# EAGLE board Qwiic_Hall_Effect_Sensor_TMAG5273_Mini-Panel (EAGLE 9.6.2), part 1 of 4
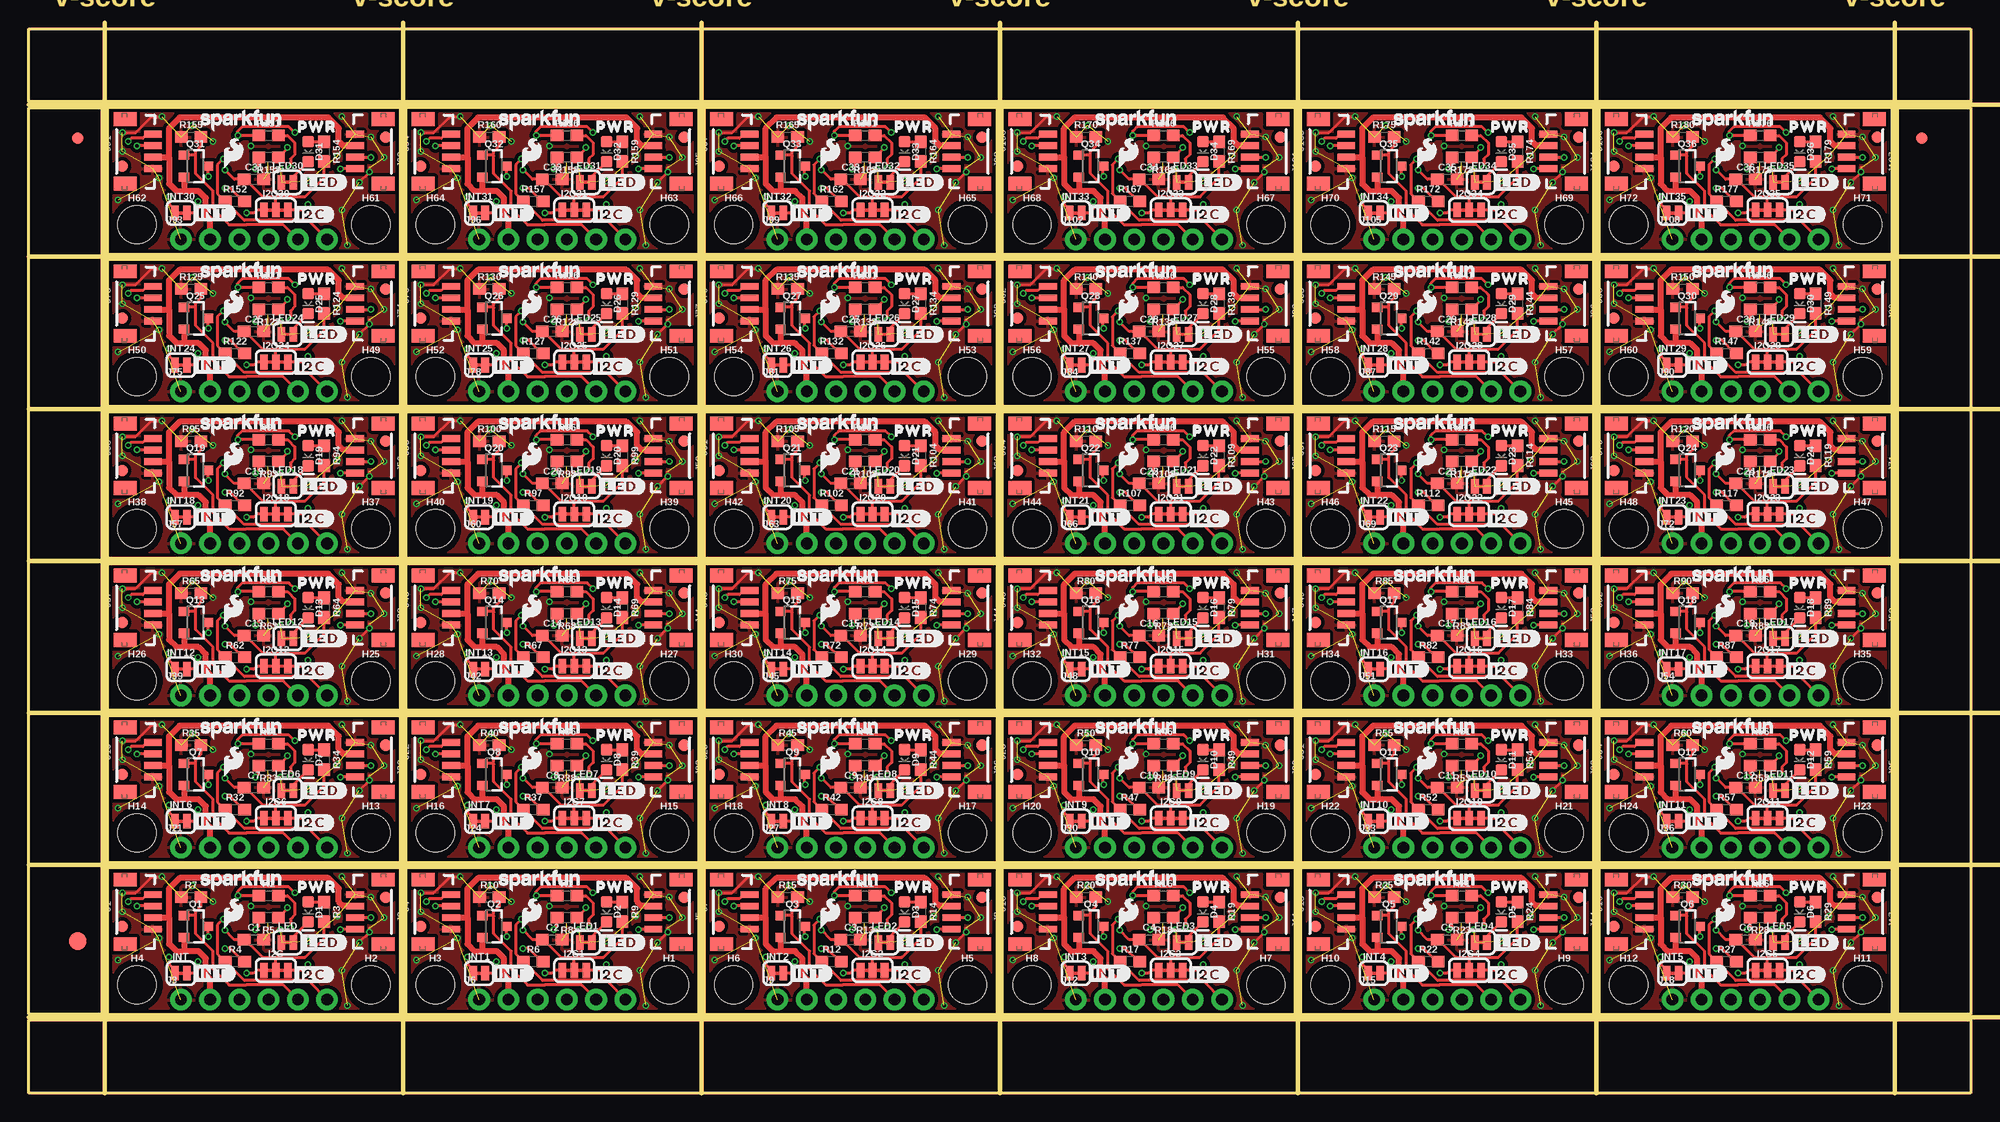
[diagram p0: board, top side]
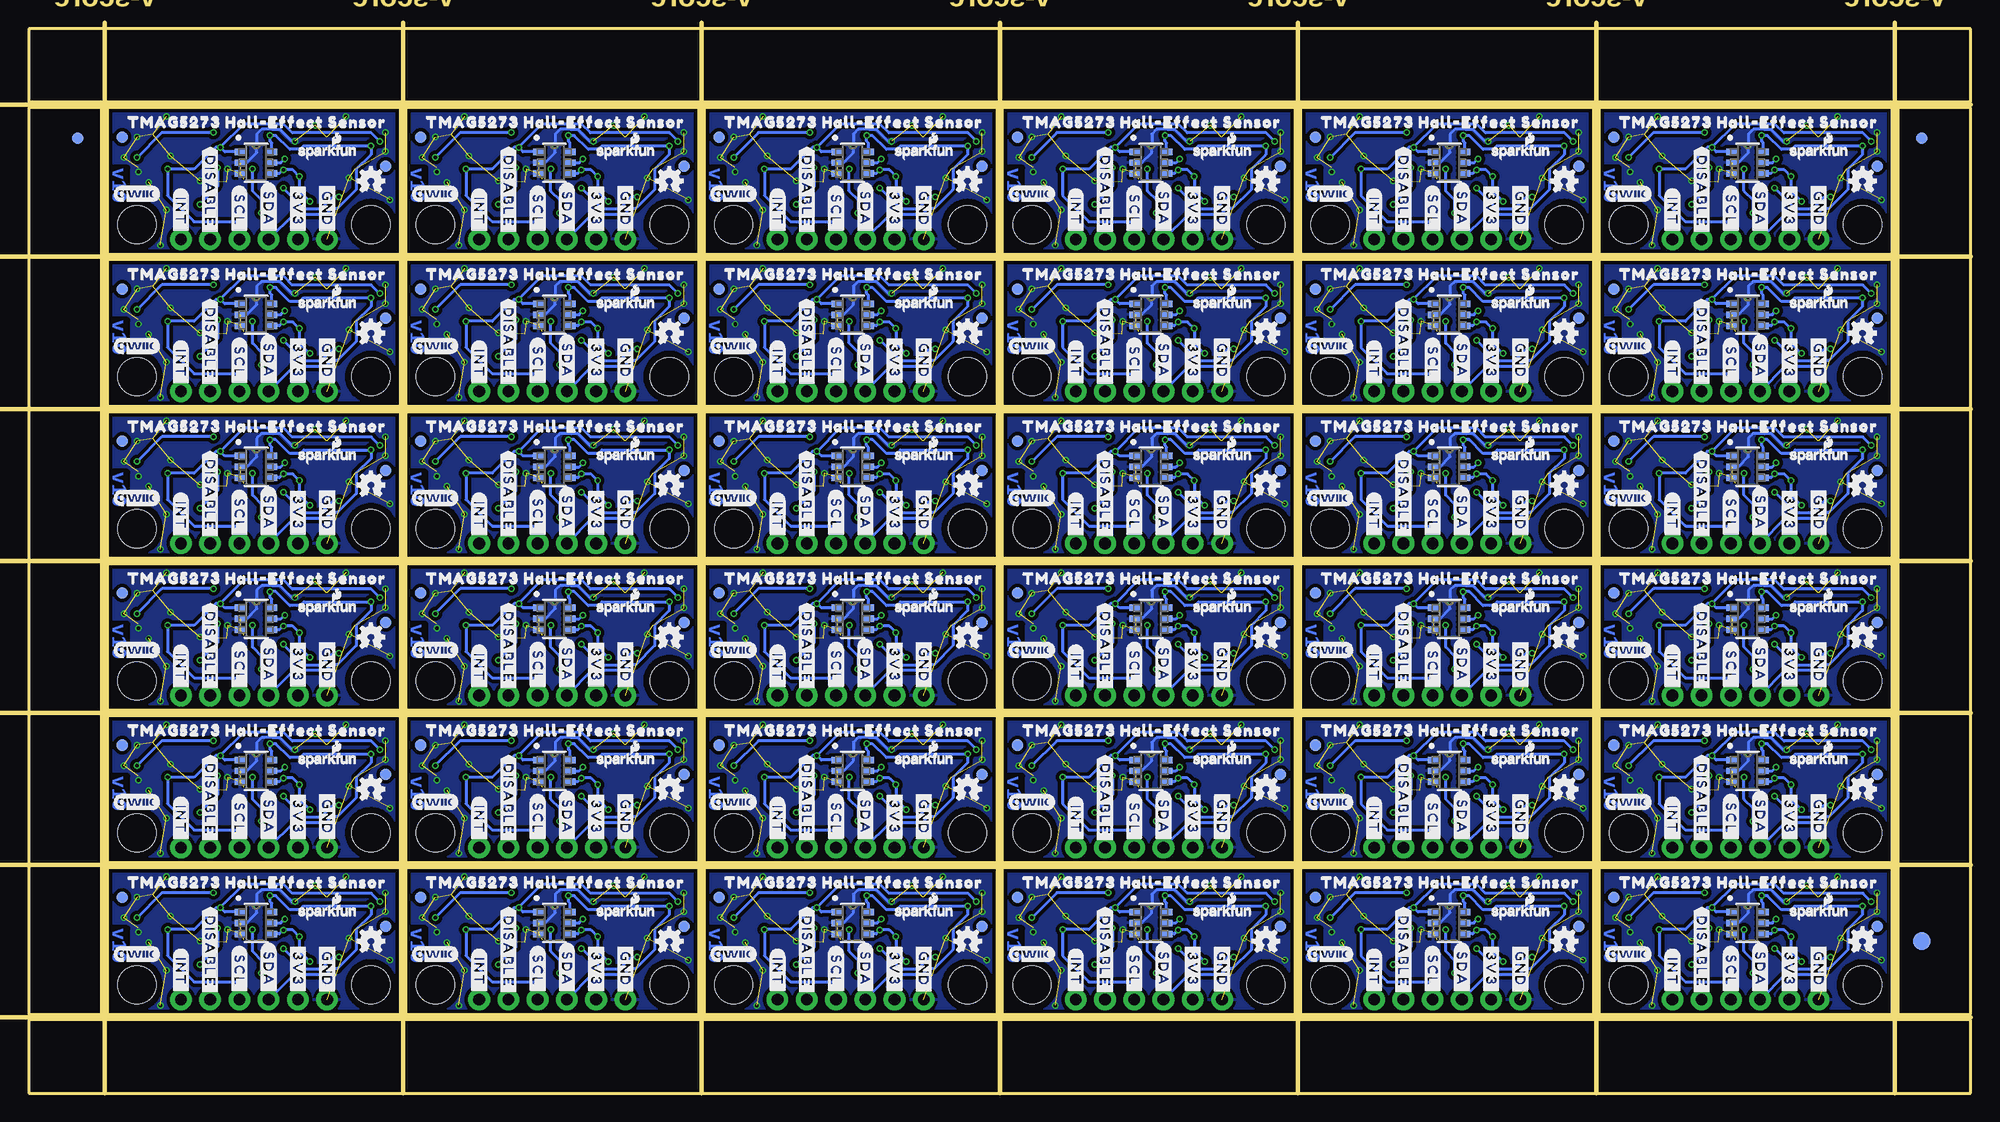
[diagram p1: board, bottom side, seen from below]

Size 168.66 x 92.46 mm. Coordinates in mm from the lower left corner, seen from the top.
Outline: 6.86,6.86 32.26,6.86 32.26,19.56 6.86,19.56 6.86,6.86
Outline: 32.77,6.86 58.17,6.86 58.17,19.56 32.77,19.56 32.77,6.86
Outline: 58.67,6.86 84.07,6.86 84.07,19.56 58.67,19.56 58.67,6.86
Outline: 84.58,6.86 109.98,6.86 109.98,19.56 84.58,19.56 84.58,6.86
Outline: 110.49,6.86 135.89,6.86 135.89,19.56 110.49,19.56 110.49,6.86
Outline: 136.4,6.86 161.8,6.86 161.8,19.56 136.4,19.56 136.4,6.86
Outline: 6.86,20.07 32.26,20.07 32.26,32.77 6.86,32.77 6.86,20.07
Outline: 32.77,20.07 58.17,20.07 58.17,32.77 32.77,32.77 32.77,20.07
Outline: 58.67,20.07 84.07,20.07 84.07,32.77 58.67,32.77 58.67,20.07
Outline: 84.58,20.07 109.98,20.07 109.98,32.77 84.58,32.77 84.58,20.07
Outline: 110.49,20.07 135.89,20.07 135.89,32.77 110.49,32.77 110.49,20.07
Outline: 136.4,20.07 161.8,20.07 161.8,32.77 136.4,32.77 136.4,20.07
Outline: 6.86,33.27 32.26,33.27 32.26,45.97 6.86,45.97 6.86,33.27
Outline: 32.77,33.27 58.17,33.27 58.17,45.97 32.77,45.97 32.77,33.27
Outline: 58.67,33.27 84.07,33.27 84.07,45.97 58.67,45.97 58.67,33.27
Outline: 84.58,33.27 109.98,33.27 109.98,45.97 84.58,45.97 84.58,33.27
Outline: 110.49,33.27 135.89,33.27 135.89,45.97 110.49,45.97 110.49,33.27
Outline: 136.4,33.27 161.8,33.27 161.8,45.97 136.4,45.97 136.4,33.27
Outline: 6.86,46.48 32.26,46.48 32.26,59.18 6.86,59.18 6.86,46.48
Outline: 32.77,46.48 58.17,46.48 58.17,59.18 32.77,59.18 32.77,46.48
Outline: 58.67,46.48 84.07,46.48 84.07,59.18 58.67,59.18 58.67,46.48
Outline: 84.58,46.48 109.98,46.48 109.98,59.18 84.58,59.18 84.58,46.48
Outline: 110.49,46.48 135.89,46.48 135.89,59.18 110.49,59.18 110.49,46.48
Outline: 136.4,46.48 161.8,46.48 161.8,59.18 136.4,59.18 136.4,46.48
Outline: 6.86,59.69 32.26,59.69 32.26,72.39 6.86,72.39 6.86,59.69
Outline: 32.77,59.69 58.17,59.69 58.17,72.39 32.77,72.39 32.77,59.69
Outline: 58.67,59.69 84.07,59.69 84.07,72.39 58.67,72.39 58.67,59.69
Outline: 84.58,59.69 109.98,59.69 109.98,72.39 84.58,72.39 84.58,59.69
Outline: 110.49,59.69 135.89,59.69 135.89,72.39 110.49,72.39 110.49,59.69
Outline: 136.4,59.69 161.8,59.69 161.8,72.39 136.4,72.39 136.4,59.69
Outline: 6.86,72.9 32.26,72.9 32.26,85.6 6.86,85.6 6.86,72.9
Outline: 32.77,72.9 58.17,72.9 58.17,85.6 32.77,85.6 32.77,72.9
Outline: 58.67,72.9 84.07,72.9 84.07,85.6 58.67,85.6 58.67,72.9
Outline: 84.58,72.9 109.98,72.9 109.98,85.6 84.58,85.6 84.58,72.9
Outline: 110.49,72.9 135.89,72.9 135.89,85.6 110.49,85.6 110.49,72.9
Outline: 136.4,72.9 161.8,72.9 161.8,85.6 136.4,85.6 136.4,72.9
Outline: 0,6.35 168.66,6.35 168.66,0 0,0 0,6.35
Outline: 162.31,85.6 168.66,85.6 168.66,6.86 162.31,6.86 162.31,85.6
Outline: 0,92.46 168.66,92.46 168.66,86.11 0,86.11 0,92.46
Outline: 0,85.6 6.35,85.6 6.35,6.86 0,6.86 0,85.6
Copper layers (1*16): Top 0.035mm / dielectric 1.5mm / Bottom 0.035mm
Design rules "Qwiic_Hall_Effect_Sensor_TMAG5273_Mini": minimum track width 5mil, minimum drill 0.3mm, track to track 5mil, track to pad 5mil, pad to pad 5mil, via to via 5mil, smd to smd 5mil, copper to edge 7mil, drill to drill 7mil, minimum pad ring 5mil, minimum via ring 5mil, stop-mask expansion 2.5mil, vias tented up to drill 25mil, thermal gap 10mil
Milling: 14 lines

## Footprints (pad centres in the part's own frame; a part is rotated, then mirrored left to right if it is on the bottom)
0603 = smd 1.1 x 1: 1 -0.85,0; 2 0.85,0
LED-0603 = smd 1 x 1: A -0.877,0; C 0.877,0
FIDUCIAL-1X2 = smd 1 x 1: 1 0,0
FIDUCIAL-1.5X3 = smd 1.5 x 1.5: 1 0,0
STAND-OFF = hole 3.302: 0,0
SMT-JUMPER_3_2-NC_TRACE_SILK = smd 0.66 x 1.27: 1 -1.041,0; 2 0,0; 3 1.041,0
SMT-JUMPER_2_NC_TRACE_SILK = smd 0.66 x 1.27: 1 -0.521,0; 2 0.521,0
JST04_1MM_VERT = smd 0.6 x 1.55: 1 -1.5,0.775; 2 -0.5,0.775; 3 0.5,0.775; 4 1.5,0.775 | smd 1.2 x 2: NC1 -2.8,3.2; NC2 2.8,3.2
1X06_NO_SILK = drill 1.016 pad 1.88: 1 0,0; 2 2.54,0; 3 5.08,0; 4 7.62,0; 5 10.16,0; 6 12.7,0
SOT23-3 = smd 0.8 x 0.9: 1 -0.95,-1; 2 0.95,-1; 3 0,1.1
SOT23-6_DBV_TEX = smd 0.978 x 0.559: 1 -1.365,0.95; 2 -1.365,0; 3 -1.365,-0.95; 4 1.365,-0.95; 5 1.365,0; 6 1.365,0.95

## Placement (x,y rotation side)
C1  0.1uF  [0603]  19.56,13.34 0 top
C2  0.1uF  [0603]  45.47,13.34 0 top
C3  0.1uF  [0603]  71.37,13.34 0 top
C4  0.1uF  [0603]  97.28,13.34 0 top
C5  0.1uF  [0603]  123.19,13.34 0 top
C6  0.1uF  [0603]  149.1,13.34 0 top
C7  0.1uF  [0603]  19.56,26.54 0 top
C8  0.1uF  [0603]  45.47,26.54 0 top
C9  0.1uF  [0603]  71.37,26.54 0 top
C10  0.1uF  [0603]  97.28,26.54 0 top
C11  0.1uF  [0603]  123.19,26.54 0 top
C12  0.1uF  [0603]  149.1,26.54 0 top
C13  0.1uF  [0603]  19.56,39.75 0 top
C14  0.1uF  [0603]  45.47,39.75 0 top
C15  0.1uF  [0603]  71.37,39.75 0 top
C16  0.1uF  [0603]  97.28,39.75 0 top
C17  0.1uF  [0603]  123.19,39.75 0 top
C18  0.1uF  [0603]  149.1,39.75 0 top
C19  0.1uF  [0603]  19.56,52.96 0 top
C20  0.1uF  [0603]  45.47,52.96 0 top
C21  0.1uF  [0603]  71.37,52.96 0 top
C22  0.1uF  [0603]  97.28,52.96 0 top
C23  0.1uF  [0603]  123.19,52.96 0 top
C24  0.1uF  [0603]  149.1,52.96 0 top
C25  0.1uF  [0603]  19.56,66.17 0 top
C26  0.1uF  [0603]  45.47,66.17 0 top
C27  0.1uF  [0603]  71.37,66.17 0 top
C28  0.1uF  [0603]  97.28,66.17 0 top
C29  0.1uF  [0603]  123.19,66.17 0 top
C30  0.1uF  [0603]  149.1,66.17 0 top
C31  0.1uF  [0603]  19.56,79.38 0 top
C32  0.1uF  [0603]  45.47,79.38 0 top
C33  0.1uF  [0603]  71.37,79.38 0 top
C34  0.1uF  [0603]  97.28,79.38 0 top
C35  0.1uF  [0603]  123.19,79.38 0 top
C36  0.1uF  [0603]  149.1,79.38 0 top
D1  Red  [LED-0603]  24.26,15.75 270 top
D2  Red  [LED-0603]  50.16,15.75 270 top
D3  Red  [LED-0603]  76.07,15.75 270 top
D4  Red  [LED-0603]  101.98,15.75 270 top
D5  Red  [LED-0603]  127.89,15.75 270 top
D6  Red  [LED-0603]  153.8,15.75 270 top
D7  Red  [LED-0603]  24.26,28.96 270 top
D8  Red  [LED-0603]  50.16,28.96 270 top
D9  Red  [LED-0603]  76.07,28.96 270 top
D10  Red  [LED-0603]  101.98,28.96 270 top
D11  Red  [LED-0603]  127.89,28.96 270 top
D12  Red  [LED-0603]  153.8,28.96 270 top
D13  Red  [LED-0603]  24.26,42.16 270 top
D14  Red  [LED-0603]  50.16,42.16 270 top
D15  Red  [LED-0603]  76.07,42.16 270 top
D16  Red  [LED-0603]  101.98,42.16 270 top
D17  Red  [LED-0603]  127.89,42.16 270 top
D18  Red  [LED-0603]  153.8,42.16 270 top
D19  Red  [LED-0603]  24.26,55.37 270 top
D20  Red  [LED-0603]  50.16,55.37 270 top
D21  Red  [LED-0603]  76.07,55.37 270 top
D22  Red  [LED-0603]  101.98,55.37 270 top
D23  Red  [LED-0603]  127.89,55.37 270 top
D24  Red  [LED-0603]  153.8,55.37 270 top
D25  Red  [LED-0603]  24.26,68.58 270 top
D26  Red  [LED-0603]  50.16,68.58 270 top
D27  Red  [LED-0603]  76.07,68.58 270 top
D28  Red  [LED-0603]  101.98,68.58 270 top
D29  Red  [LED-0603]  127.89,68.58 270 top
D30  Red  [LED-0603]  153.8,68.58 270 top
D31  Red  [LED-0603]  24.26,81.79 270 top
D32  Red  [LED-0603]  50.16,81.79 270 top
D33  Red  [LED-0603]  76.07,81.79 270 top
D34  Red  [LED-0603]  101.98,81.79 270 top
D35  Red  [LED-0603]  127.89,81.79 270 top
D36  Red  [LED-0603]  153.8,81.79 270 top
E$1  [FIDUCIAL-1X2]  4.23,82.93 0 top
E$2  [FIDUCIAL-1X2]  4.23,82.93 0 bottom
E$3  [FIDUCIAL-1X2]  164.42,82.93 0 top
E$4  [FIDUCIAL-1X2]  164.42,82.93 0 bottom
E$5  [FIDUCIAL-1.5X3]  4.23,13.21 0 top
E$6  [FIDUCIAL-1.5X3]  4.23,13.21 0 bottom
FD1  FIDUCIAL1X2  [FIDUCIAL-1X2]  30.99,17.02 0 top
FD2  FIDUCIAL1X2  [FIDUCIAL-1X2]  8.13,14.48 0 top
FD3  FIDUCIAL1X2  [FIDUCIAL-1X2]  8.13,14.48 0 bottom
FD4  FIDUCIAL1X2  [FIDUCIAL-1X2]  30.99,17.02 0 bottom
FD5  FIDUCIAL1X2  [FIDUCIAL-1X2]  56.9,17.02 0 top
FD6  FIDUCIAL1X2  [FIDUCIAL-1X2]  34.04,14.48 0 top
FD7  FIDUCIAL1X2  [FIDUCIAL-1X2]  34.04,14.48 0 bottom
FD8  FIDUCIAL1X2  [FIDUCIAL-1X2]  56.9,17.02 0 bottom
FD9  FIDUCIAL1X2  [FIDUCIAL-1X2]  82.8,17.02 0 top
FD10  FIDUCIAL1X2  [FIDUCIAL-1X2]  59.94,14.48 0 top
FD11  FIDUCIAL1X2  [FIDUCIAL-1X2]  59.94,14.48 0 bottom
FD12  FIDUCIAL1X2  [FIDUCIAL-1X2]  82.8,17.02 0 bottom
FD13  FIDUCIAL1X2  [FIDUCIAL-1X2]  108.71,17.02 0 top
FD14  FIDUCIAL1X2  [FIDUCIAL-1X2]  85.85,14.48 0 top
FD15  FIDUCIAL1X2  [FIDUCIAL-1X2]  85.85,14.48 0 bottom
FD16  FIDUCIAL1X2  [FIDUCIAL-1X2]  108.71,17.02 0 bottom
FD17  FIDUCIAL1X2  [FIDUCIAL-1X2]  134.62,17.02 0 top
FD18  FIDUCIAL1X2  [FIDUCIAL-1X2]  111.76,14.48 0 top
FD19  FIDUCIAL1X2  [FIDUCIAL-1X2]  111.76,14.48 0 bottom
FD20  FIDUCIAL1X2  [FIDUCIAL-1X2]  134.62,17.02 0 bottom
FD21  FIDUCIAL1X2  [FIDUCIAL-1X2]  160.53,17.02 0 top
FD22  FIDUCIAL1X2  [FIDUCIAL-1X2]  137.67,14.48 0 top
FD23  FIDUCIAL1X2  [FIDUCIAL-1X2]  137.67,14.48 0 bottom
FD24  FIDUCIAL1X2  [FIDUCIAL-1X2]  160.53,17.02 0 bottom
FD25  FIDUCIAL1X2  [FIDUCIAL-1X2]  30.99,30.23 0 top
FD26  FIDUCIAL1X2  [FIDUCIAL-1X2]  8.13,27.69 0 top
FD27  FIDUCIAL1X2  [FIDUCIAL-1X2]  8.13,27.69 0 bottom
FD28  FIDUCIAL1X2  [FIDUCIAL-1X2]  30.99,30.23 0 bottom
FD29  FIDUCIAL1X2  [FIDUCIAL-1X2]  56.9,30.23 0 top
FD30  FIDUCIAL1X2  [FIDUCIAL-1X2]  34.04,27.69 0 top
FD31  FIDUCIAL1X2  [FIDUCIAL-1X2]  34.04,27.69 0 bottom
FD32  FIDUCIAL1X2  [FIDUCIAL-1X2]  56.9,30.23 0 bottom
FD33  FIDUCIAL1X2  [FIDUCIAL-1X2]  82.8,30.23 0 top
FD34  FIDUCIAL1X2  [FIDUCIAL-1X2]  59.94,27.69 0 top
FD35  FIDUCIAL1X2  [FIDUCIAL-1X2]  59.94,27.69 0 bottom
FD36  FIDUCIAL1X2  [FIDUCIAL-1X2]  82.8,30.23 0 bottom
FD37  FIDUCIAL1X2  [FIDUCIAL-1X2]  108.71,30.23 0 top
FD38  FIDUCIAL1X2  [FIDUCIAL-1X2]  85.85,27.69 0 top
FD39  FIDUCIAL1X2  [FIDUCIAL-1X2]  85.85,27.69 0 bottom
FD40  FIDUCIAL1X2  [FIDUCIAL-1X2]  108.71,30.23 0 bottom
FD41  FIDUCIAL1X2  [FIDUCIAL-1X2]  134.62,30.23 0 top
FD42  FIDUCIAL1X2  [FIDUCIAL-1X2]  111.76,27.69 0 top
FD43  FIDUCIAL1X2  [FIDUCIAL-1X2]  111.76,27.69 0 bottom
FD44  FIDUCIAL1X2  [FIDUCIAL-1X2]  134.62,30.23 0 bottom
FD45  FIDUCIAL1X2  [FIDUCIAL-1X2]  160.53,30.23 0 top
FD46  FIDUCIAL1X2  [FIDUCIAL-1X2]  137.67,27.69 0 top
FD47  FIDUCIAL1X2  [FIDUCIAL-1X2]  137.67,27.69 0 bottom
FD48  FIDUCIAL1X2  [FIDUCIAL-1X2]  160.53,30.23 0 bottom
FD49  FIDUCIAL1X2  [FIDUCIAL-1X2]  30.99,43.43 0 top
FD50  FIDUCIAL1X2  [FIDUCIAL-1X2]  8.13,40.89 0 top
FD51  FIDUCIAL1X2  [FIDUCIAL-1X2]  8.13,40.89 0 bottom
FD52  FIDUCIAL1X2  [FIDUCIAL-1X2]  30.99,43.43 0 bottom
FD53  FIDUCIAL1X2  [FIDUCIAL-1X2]  56.9,43.43 0 top
FD54  FIDUCIAL1X2  [FIDUCIAL-1X2]  34.04,40.89 0 top
FD55  FIDUCIAL1X2  [FIDUCIAL-1X2]  34.04,40.89 0 bottom
FD56  FIDUCIAL1X2  [FIDUCIAL-1X2]  56.9,43.43 0 bottom
FD57  FIDUCIAL1X2  [FIDUCIAL-1X2]  82.8,43.43 0 top
FD58  FIDUCIAL1X2  [FIDUCIAL-1X2]  59.94,40.89 0 top
FD59  FIDUCIAL1X2  [FIDUCIAL-1X2]  59.94,40.89 0 bottom
FD60  FIDUCIAL1X2  [FIDUCIAL-1X2]  82.8,43.43 0 bottom
FD61  FIDUCIAL1X2  [FIDUCIAL-1X2]  108.71,43.43 0 top
FD62  FIDUCIAL1X2  [FIDUCIAL-1X2]  85.85,40.89 0 top
FD63  FIDUCIAL1X2  [FIDUCIAL-1X2]  85.85,40.89 0 bottom
FD64  FIDUCIAL1X2  [FIDUCIAL-1X2]  108.71,43.43 0 bottom
FD65  FIDUCIAL1X2  [FIDUCIAL-1X2]  134.62,43.43 0 top
FD66  FIDUCIAL1X2  [FIDUCIAL-1X2]  111.76,40.89 0 top
FD67  FIDUCIAL1X2  [FIDUCIAL-1X2]  111.76,40.89 0 bottom
FD68  FIDUCIAL1X2  [FIDUCIAL-1X2]  134.62,43.43 0 bottom
FD69  FIDUCIAL1X2  [FIDUCIAL-1X2]  160.53,43.43 0 top
FD70  FIDUCIAL1X2  [FIDUCIAL-1X2]  137.67,40.89 0 top
FD71  FIDUCIAL1X2  [FIDUCIAL-1X2]  137.67,40.89 0 bottom
FD72  FIDUCIAL1X2  [FIDUCIAL-1X2]  160.53,43.43 0 bottom
FD73  FIDUCIAL1X2  [FIDUCIAL-1X2]  30.99,56.64 0 top
FD74  FIDUCIAL1X2  [FIDUCIAL-1X2]  8.13,54.1 0 top
FD75  FIDUCIAL1X2  [FIDUCIAL-1X2]  8.13,54.1 0 bottom
FD76  FIDUCIAL1X2  [FIDUCIAL-1X2]  30.99,56.64 0 bottom
FD77  FIDUCIAL1X2  [FIDUCIAL-1X2]  56.9,56.64 0 top
FD78  FIDUCIAL1X2  [FIDUCIAL-1X2]  34.04,54.1 0 top
FD79  FIDUCIAL1X2  [FIDUCIAL-1X2]  34.04,54.1 0 bottom
FD80  FIDUCIAL1X2  [FIDUCIAL-1X2]  56.9,56.64 0 bottom
FD81  FIDUCIAL1X2  [FIDUCIAL-1X2]  82.8,56.64 0 top
FD82  FIDUCIAL1X2  [FIDUCIAL-1X2]  59.94,54.1 0 top
FD83  FIDUCIAL1X2  [FIDUCIAL-1X2]  59.94,54.1 0 bottom
FD84  FIDUCIAL1X2  [FIDUCIAL-1X2]  82.8,56.64 0 bottom
FD85  FIDUCIAL1X2  [FIDUCIAL-1X2]  108.71,56.64 0 top
FD86  FIDUCIAL1X2  [FIDUCIAL-1X2]  85.85,54.1 0 top
FD87  FIDUCIAL1X2  [FIDUCIAL-1X2]  85.85,54.1 0 bottom
FD88  FIDUCIAL1X2  [FIDUCIAL-1X2]  108.71,56.64 0 bottom
FD89  FIDUCIAL1X2  [FIDUCIAL-1X2]  134.62,56.64 0 top
FD90  FIDUCIAL1X2  [FIDUCIAL-1X2]  111.76,54.1 0 top
FD91  FIDUCIAL1X2  [FIDUCIAL-1X2]  111.76,54.1 0 bottom
FD92  FIDUCIAL1X2  [FIDUCIAL-1X2]  134.62,56.64 0 bottom
FD93  FIDUCIAL1X2  [FIDUCIAL-1X2]  160.53,56.64 0 top
FD94  FIDUCIAL1X2  [FIDUCIAL-1X2]  137.67,54.1 0 top
FD95  FIDUCIAL1X2  [FIDUCIAL-1X2]  137.67,54.1 0 bottom
FD96  FIDUCIAL1X2  [FIDUCIAL-1X2]  160.53,56.64 0 bottom
FD97  FIDUCIAL1X2  [FIDUCIAL-1X2]  30.99,69.85 0 top
FD98  FIDUCIAL1X2  [FIDUCIAL-1X2]  8.13,67.31 0 top
FD99  FIDUCIAL1X2  [FIDUCIAL-1X2]  8.13,67.31 0 bottom
FD100  FIDUCIAL1X2  [FIDUCIAL-1X2]  30.99,69.85 0 bottom
FD101  FIDUCIAL1X2  [FIDUCIAL-1X2]  56.9,69.85 0 top
FD102  FIDUCIAL1X2  [FIDUCIAL-1X2]  34.04,67.31 0 top
FD103  FIDUCIAL1X2  [FIDUCIAL-1X2]  34.04,67.31 0 bottom
FD104  FIDUCIAL1X2  [FIDUCIAL-1X2]  56.9,69.85 0 bottom
FD105  FIDUCIAL1X2  [FIDUCIAL-1X2]  82.8,69.85 0 top
FD106  FIDUCIAL1X2  [FIDUCIAL-1X2]  59.94,67.31 0 top
FD107  FIDUCIAL1X2  [FIDUCIAL-1X2]  59.94,67.31 0 bottom
FD108  FIDUCIAL1X2  [FIDUCIAL-1X2]  82.8,69.85 0 bottom
FD109  FIDUCIAL1X2  [FIDUCIAL-1X2]  108.71,69.85 0 top
FD110  FIDUCIAL1X2  [FIDUCIAL-1X2]  85.85,67.31 0 top
FD111  FIDUCIAL1X2  [FIDUCIAL-1X2]  85.85,67.31 0 bottom
FD112  FIDUCIAL1X2  [FIDUCIAL-1X2]  108.71,69.85 0 bottom
FD113  FIDUCIAL1X2  [FIDUCIAL-1X2]  134.62,69.85 0 top
FD114  FIDUCIAL1X2  [FIDUCIAL-1X2]  111.76,67.31 0 top
FD115  FIDUCIAL1X2  [FIDUCIAL-1X2]  111.76,67.31 0 bottom
FD116  FIDUCIAL1X2  [FIDUCIAL-1X2]  134.62,69.85 0 bottom
FD117  FIDUCIAL1X2  [FIDUCIAL-1X2]  160.53,69.85 0 top
FD118  FIDUCIAL1X2  [FIDUCIAL-1X2]  137.67,67.31 0 top
FD119  FIDUCIAL1X2  [FIDUCIAL-1X2]  137.67,67.31 0 bottom
FD120  FIDUCIAL1X2  [FIDUCIAL-1X2]  160.53,69.85 0 bottom
FD121  FIDUCIAL1X2  [FIDUCIAL-1X2]  30.99,83.06 0 top
FD122  FIDUCIAL1X2  [FIDUCIAL-1X2]  8.13,80.52 0 top
FD123  FIDUCIAL1X2  [FIDUCIAL-1X2]  8.13,80.52 0 bottom
FD124  FIDUCIAL1X2  [FIDUCIAL-1X2]  30.99,83.06 0 bottom
FD125  FIDUCIAL1X2  [FIDUCIAL-1X2]  56.9,83.06 0 top
FD126  FIDUCIAL1X2  [FIDUCIAL-1X2]  34.04,80.52 0 top
FD127  FIDUCIAL1X2  [FIDUCIAL-1X2]  34.04,80.52 0 bottom
FD128  FIDUCIAL1X2  [FIDUCIAL-1X2]  56.9,83.06 0 bottom
FD129  FIDUCIAL1X2  [FIDUCIAL-1X2]  82.8,83.06 0 top
FD130  FIDUCIAL1X2  [FIDUCIAL-1X2]  59.94,80.52 0 top
FD131  FIDUCIAL1X2  [FIDUCIAL-1X2]  59.94,80.52 0 bottom
FD132  FIDUCIAL1X2  [FIDUCIAL-1X2]  82.8,83.06 0 bottom
FD133  FIDUCIAL1X2  [FIDUCIAL-1X2]  108.71,83.06 0 top
FD134  FIDUCIAL1X2  [FIDUCIAL-1X2]  85.85,80.52 0 top
FD135  FIDUCIAL1X2  [FIDUCIAL-1X2]  85.85,80.52 0 bottom
FD136  FIDUCIAL1X2  [FIDUCIAL-1X2]  108.71,83.06 0 bottom
FD137  FIDUCIAL1X2  [FIDUCIAL-1X2]  134.62,83.06 0 top
FD138  FIDUCIAL1X2  [FIDUCIAL-1X2]  111.76,80.52 0 top
FD139  FIDUCIAL1X2  [FIDUCIAL-1X2]  111.76,80.52 0 bottom
FD140  FIDUCIAL1X2  [FIDUCIAL-1X2]  134.62,83.06 0 bottom
FD141  FIDUCIAL1X2  [FIDUCIAL-1X2]  160.53,83.06 0 top
FD142  FIDUCIAL1X2  [FIDUCIAL-1X2]  137.67,80.52 0 top
FD143  FIDUCIAL1X2  [FIDUCIAL-1X2]  137.67,80.52 0 bottom
FD144  FIDUCIAL1X2  [FIDUCIAL-1X2]  160.53,83.06 0 bottom
H1  STAND-OFF  [STAND-OFF]  55.63,9.4 0 top
H2  STAND-OFF  [STAND-OFF]  29.72,9.4 0 top
H3  STAND-OFF  [STAND-OFF]  35.31,9.4 0 top
H4  STAND-OFF  [STAND-OFF]  9.4,9.4 0 top
H5  STAND-OFF  [STAND-OFF]  81.53,9.4 0 top
H6  STAND-OFF  [STAND-OFF]  61.21,9.4 0 top
H7  STAND-OFF  [STAND-OFF]  107.44,9.4 0 top
H8  STAND-OFF  [STAND-OFF]  87.12,9.4 0 top
H9  STAND-OFF  [STAND-OFF]  133.35,9.4 0 top
H10  STAND-OFF  [STAND-OFF]  113.03,9.4 0 top
H11  STAND-OFF  [STAND-OFF]  159.26,9.4 0 top
H12  STAND-OFF  [STAND-OFF]  138.94,9.4 0 top
H13  STAND-OFF  [STAND-OFF]  29.72,22.61 0 top
H14  STAND-OFF  [STAND-OFF]  9.4,22.61 0 top
H15  STAND-OFF  [STAND-OFF]  55.63,22.61 0 top
H16  STAND-OFF  [STAND-OFF]  35.31,22.61 0 top
H17  STAND-OFF  [STAND-OFF]  81.53,22.61 0 top
H18  STAND-OFF  [STAND-OFF]  61.21,22.61 0 top
H19  STAND-OFF  [STAND-OFF]  107.44,22.61 0 top
H20  STAND-OFF  [STAND-OFF]  87.12,22.61 0 top
H21  STAND-OFF  [STAND-OFF]  133.35,22.61 0 top
H22  STAND-OFF  [STAND-OFF]  113.03,22.61 0 top
H23  STAND-OFF  [STAND-OFF]  159.26,22.61 0 top
H24  STAND-OFF  [STAND-OFF]  138.94,22.61 0 top
H25  STAND-OFF  [STAND-OFF]  29.72,35.81 0 top
H26  STAND-OFF  [STAND-OFF]  9.4,35.81 0 top
H27  STAND-OFF  [STAND-OFF]  55.63,35.81 0 top
H28  STAND-OFF  [STAND-OFF]  35.31,35.81 0 top
H29  STAND-OFF  [STAND-OFF]  81.53,35.81 0 top
H30  STAND-OFF  [STAND-OFF]  61.21,35.81 0 top
H31  STAND-OFF  [STAND-OFF]  107.44,35.81 0 top
H32  STAND-OFF  [STAND-OFF]  87.12,35.81 0 top
H33  STAND-OFF  [STAND-OFF]  133.35,35.81 0 top
H34  STAND-OFF  [STAND-OFF]  113.03,35.81 0 top
H35  STAND-OFF  [STAND-OFF]  159.26,35.81 0 top
H36  STAND-OFF  [STAND-OFF]  138.94,35.81 0 top
H37  STAND-OFF  [STAND-OFF]  29.72,49.02 0 top
H38  STAND-OFF  [STAND-OFF]  9.4,49.02 0 top
H39  STAND-OFF  [STAND-OFF]  55.63,49.02 0 top
H40  STAND-OFF  [STAND-OFF]  35.31,49.02 0 top
H41  STAND-OFF  [STAND-OFF]  81.53,49.02 0 top
H42  STAND-OFF  [STAND-OFF]  61.21,49.02 0 top
H43  STAND-OFF  [STAND-OFF]  107.44,49.02 0 top
H44  STAND-OFF  [STAND-OFF]  87.12,49.02 0 top
H45  STAND-OFF  [STAND-OFF]  133.35,49.02 0 top
H46  STAND-OFF  [STAND-OFF]  113.03,49.02 0 top
H47  STAND-OFF  [STAND-OFF]  159.26,49.02 0 top
H48  STAND-OFF  [STAND-OFF]  138.94,49.02 0 top
H49  STAND-OFF  [STAND-OFF]  29.72,62.23 0 top
H50  STAND-OFF  [STAND-OFF]  9.4,62.23 0 top
H51  STAND-OFF  [STAND-OFF]  55.63,62.23 0 top
H52  STAND-OFF  [STAND-OFF]  35.31,62.23 0 top
H53  STAND-OFF  [STAND-OFF]  81.53,62.23 0 top
H54  STAND-OFF  [STAND-OFF]  61.21,62.23 0 top
H55  STAND-OFF  [STAND-OFF]  107.44,62.23 0 top
H56  STAND-OFF  [STAND-OFF]  87.12,62.23 0 top
H57  STAND-OFF  [STAND-OFF]  133.35,62.23 0 top
H58  STAND-OFF  [STAND-OFF]  113.03,62.23 0 top
H59  STAND-OFF  [STAND-OFF]  159.26,62.23 0 top
H60  STAND-OFF  [STAND-OFF]  138.94,62.23 0 top
H61  STAND-OFF  [STAND-OFF]  29.72,75.44 0 top
H62  STAND-OFF  [STAND-OFF]  9.4,75.44 0 top
H63  STAND-OFF  [STAND-OFF]  55.63,75.44 0 top
H64  STAND-OFF  [STAND-OFF]  35.31,75.44 0 top
H65  STAND-OFF  [STAND-OFF]  81.53,75.44 0 top
H66  STAND-OFF  [STAND-OFF]  61.21,75.44 0 top
H67  STAND-OFF  [STAND-OFF]  107.44,75.44 0 top
H68  STAND-OFF  [STAND-OFF]  87.12,75.44 0 top
H69  STAND-OFF  [STAND-OFF]  133.35,75.44 0 top
H70  STAND-OFF  [STAND-OFF]  113.03,75.44 0 top
H71  STAND-OFF  [STAND-OFF]  159.26,75.44 0 top
H72  STAND-OFF  [STAND-OFF]  138.94,75.44 0 top
I2C  JUMPER-SMT_3_2-NC_TRACE_SILK  [SMT-JUMPER_3_2-NC_TRACE_SILK]  21.46,10.67 0 top
I2C1  JUMPER-SMT_3_2-NC_TRACE_SILK  [SMT-JUMPER_3_2-NC_TRACE_SILK]  47.37,10.67 0 top
I2C2  JUMPER-SMT_3_2-NC_TRACE_SILK  [SMT-JUMPER_3_2-NC_TRACE_SILK]  73.28,10.67 0 top
I2C3  JUMPER-SMT_3_2-NC_TRACE_SILK  [SMT-JUMPER_3_2-NC_TRACE_SILK]  99.19,10.67 0 top
I2C4  JUMPER-SMT_3_2-NC_TRACE_SILK  [SMT-JUMPER_3_2-NC_TRACE_SILK]  125.09,10.67 0 top
I2C5  JUMPER-SMT_3_2-NC_TRACE_SILK  [SMT-JUMPER_3_2-NC_TRACE_SILK]  151,10.67 0 top
I2C6  JUMPER-SMT_3_2-NC_TRACE_SILK  [SMT-JUMPER_3_2-NC_TRACE_SILK]  21.46,23.88 0 top
I2C7  JUMPER-SMT_3_2-NC_TRACE_SILK  [SMT-JUMPER_3_2-NC_TRACE_SILK]  47.37,23.88 0 top
I2C8  JUMPER-SMT_3_2-NC_TRACE_SILK  [SMT-JUMPER_3_2-NC_TRACE_SILK]  73.28,23.88 0 top
I2C9  JUMPER-SMT_3_2-NC_TRACE_SILK  [SMT-JUMPER_3_2-NC_TRACE_SILK]  99.19,23.88 0 top
I2C10  JUMPER-SMT_3_2-NC_TRACE_SILK  [SMT-JUMPER_3_2-NC_TRACE_SILK]  125.09,23.88 0 top
I2C11  JUMPER-SMT_3_2-NC_TRACE_SILK  [SMT-JUMPER_3_2-NC_TRACE_SILK]  151,23.88 0 top
I2C12  JUMPER-SMT_3_2-NC_TRACE_SILK  [SMT-JUMPER_3_2-NC_TRACE_SILK]  21.46,37.08 0 top
I2C13  JUMPER-SMT_3_2-NC_TRACE_SILK  [SMT-JUMPER_3_2-NC_TRACE_SILK]  47.37,37.08 0 top
I2C14  JUMPER-SMT_3_2-NC_TRACE_SILK  [SMT-JUMPER_3_2-NC_TRACE_SILK]  73.28,37.08 0 top
I2C15  JUMPER-SMT_3_2-NC_TRACE_SILK  [SMT-JUMPER_3_2-NC_TRACE_SILK]  99.19,37.08 0 top
I2C16  JUMPER-SMT_3_2-NC_TRACE_SILK  [SMT-JUMPER_3_2-NC_TRACE_SILK]  125.09,37.08 0 top
I2C17  JUMPER-SMT_3_2-NC_TRACE_SILK  [SMT-JUMPER_3_2-NC_TRACE_SILK]  151,37.08 0 top
I2C18  JUMPER-SMT_3_2-NC_TRACE_SILK  [SMT-JUMPER_3_2-NC_TRACE_SILK]  21.46,50.29 0 top
I2C19  JUMPER-SMT_3_2-NC_TRACE_SILK  [SMT-JUMPER_3_2-NC_TRACE_SILK]  47.37,50.29 0 top
I2C20  JUMPER-SMT_3_2-NC_TRACE_SILK  [SMT-JUMPER_3_2-NC_TRACE_SILK]  73.28,50.29 0 top
I2C21  JUMPER-SMT_3_2-NC_TRACE_SILK  [SMT-JUMPER_3_2-NC_TRACE_SILK]  99.19,50.29 0 top
I2C22  JUMPER-SMT_3_2-NC_TRACE_SILK  [SMT-JUMPER_3_2-NC_TRACE_SILK]  125.09,50.29 0 top
I2C23  JUMPER-SMT_3_2-NC_TRACE_SILK  [SMT-JUMPER_3_2-NC_TRACE_SILK]  151,50.29 0 top
I2C24  JUMPER-SMT_3_2-NC_TRACE_SILK  [SMT-JUMPER_3_2-NC_TRACE_SILK]  21.46,63.5 0 top
I2C25  JUMPER-SMT_3_2-NC_TRACE_SILK  [SMT-JUMPER_3_2-NC_TRACE_SILK]  47.37,63.5 0 top
I2C26  JUMPER-SMT_3_2-NC_TRACE_SILK  [SMT-JUMPER_3_2-NC_TRACE_SILK]  73.28,63.5 0 top
I2C27  JUMPER-SMT_3_2-NC_TRACE_SILK  [SMT-JUMPER_3_2-NC_TRACE_SILK]  99.19,63.5 0 top
I2C28  JUMPER-SMT_3_2-NC_TRACE_SILK  [SMT-JUMPER_3_2-NC_TRACE_SILK]  125.09,63.5 0 top
I2C29  JUMPER-SMT_3_2-NC_TRACE_SILK  [SMT-JUMPER_3_2-NC_TRACE_SILK]  151,63.5 0 top
I2C30  JUMPER-SMT_3_2-NC_TRACE_SILK  [SMT-JUMPER_3_2-NC_TRACE_SILK]  21.46,76.71 0 top
I2C31  JUMPER-SMT_3_2-NC_TRACE_SILK  [SMT-JUMPER_3_2-NC_TRACE_SILK]  47.37,76.71 0 top
I2C32  JUMPER-SMT_3_2-NC_TRACE_SILK  [SMT-JUMPER_3_2-NC_TRACE_SILK]  73.28,76.71 0 top
I2C33  JUMPER-SMT_3_2-NC_TRACE_SILK  [SMT-JUMPER_3_2-NC_TRACE_SILK]  99.19,76.71 0 top
I2C34  JUMPER-SMT_3_2-NC_TRACE_SILK  [SMT-JUMPER_3_2-NC_TRACE_SILK]  125.09,76.71 0 top
I2C35  JUMPER-SMT_3_2-NC_TRACE_SILK  [SMT-JUMPER_3_2-NC_TRACE_SILK]  151,76.71 0 top
INT  JUMPER-SMT_2_NC_TRACE_SILK  [SMT-JUMPER_2_NC_TRACE_SILK]  13.21,10.41 0 top
INT1  JUMPER-SMT_2_NC_TRACE_SILK  [SMT-JUMPER_2_NC_TRACE_SILK]  39.12,10.41 0 top
INT2  JUMPER-SMT_2_NC_TRACE_SILK  [SMT-JUMPER_2_NC_TRACE_SILK]  65.02,10.41 0 top
INT3  JUMPER-SMT_2_NC_TRACE_SILK  [SMT-JUMPER_2_NC_TRACE_SILK]  90.93,10.41 0 top
INT4  JUMPER-SMT_2_NC_TRACE_SILK  [SMT-JUMPER_2_NC_TRACE_SILK]  116.84,10.41 0 top
INT5  JUMPER-SMT_2_NC_TRACE_SILK  [SMT-JUMPER_2_NC_TRACE_SILK]  142.75,10.41 0 top
INT6  JUMPER-SMT_2_NC_TRACE_SILK  [SMT-JUMPER_2_NC_TRACE_SILK]  13.21,23.62 0 top
INT7  JUMPER-SMT_2_NC_TRACE_SILK  [SMT-JUMPER_2_NC_TRACE_SILK]  39.12,23.62 0 top
INT8  JUMPER-SMT_2_NC_TRACE_SILK  [SMT-JUMPER_2_NC_TRACE_SILK]  65.02,23.62 0 top
INT9  JUMPER-SMT_2_NC_TRACE_SILK  [SMT-JUMPER_2_NC_TRACE_SILK]  90.93,23.62 0 top
INT10  JUMPER-SMT_2_NC_TRACE_SILK  [SMT-JUMPER_2_NC_TRACE_SILK]  116.84,23.62 0 top
INT11  JUMPER-SMT_2_NC_TRACE_SILK  [SMT-JUMPER_2_NC_TRACE_SILK]  142.75,23.62 0 top
INT12  JUMPER-SMT_2_NC_TRACE_SILK  [SMT-JUMPER_2_NC_TRACE_SILK]  13.21,36.83 0 top
INT13  JUMPER-SMT_2_NC_TRACE_SILK  [SMT-JUMPER_2_NC_TRACE_SILK]  39.12,36.83 0 top
INT14  JUMPER-SMT_2_NC_TRACE_SILK  [SMT-JUMPER_2_NC_TRACE_SILK]  65.02,36.83 0 top
INT15  JUMPER-SMT_2_NC_TRACE_SILK  [SMT-JUMPER_2_NC_TRACE_SILK]  90.93,36.83 0 top
INT16  JUMPER-SMT_2_NC_TRACE_SILK  [SMT-JUMPER_2_NC_TRACE_SILK]  116.84,36.83 0 top
INT17  JUMPER-SMT_2_NC_TRACE_SILK  [SMT-JUMPER_2_NC_TRACE_SILK]  142.75,36.83 0 top
INT18  JUMPER-SMT_2_NC_TRACE_SILK  [SMT-JUMPER_2_NC_TRACE_SILK]  13.21,50.04 0 top
INT19  JUMPER-SMT_2_NC_TRACE_SILK  [SMT-JUMPER_2_NC_TRACE_SILK]  39.12,50.04 0 top
INT20  JUMPER-SMT_2_NC_TRACE_SILK  [SMT-JUMPER_2_NC_TRACE_SILK]  65.02,50.04 0 top
INT21  JUMPER-SMT_2_NC_TRACE_SILK  [SMT-JUMPER_2_NC_TRACE_SILK]  90.93,50.04 0 top
INT22  JUMPER-SMT_2_NC_TRACE_SILK  [SMT-JUMPER_2_NC_TRACE_SILK]  116.84,50.04 0 top
INT23  JUMPER-SMT_2_NC_TRACE_SILK  [SMT-JUMPER_2_NC_TRACE_SILK]  142.75,50.04 0 top
INT24  JUMPER-SMT_2_NC_TRACE_SILK  [SMT-JUMPER_2_NC_TRACE_SILK]  13.21,63.25 0 top
INT25  JUMPER-SMT_2_NC_TRACE_SILK  [SMT-JUMPER_2_NC_TRACE_SILK]  39.12,63.25 0 top
INT26  JUMPER-SMT_2_NC_TRACE_SILK  [SMT-JUMPER_2_NC_TRACE_SILK]  65.02,63.25 0 top
INT27  JUMPER-SMT_2_NC_TRACE_SILK  [SMT-JUMPER_2_NC_TRACE_SILK]  90.93,63.25 0 top
INT28  JUMPER-SMT_2_NC_TRACE_SILK  [SMT-JUMPER_2_NC_TRACE_SILK]  116.84,63.25 0 top
INT29  JUMPER-SMT_2_NC_TRACE_SILK  [SMT-JUMPER_2_NC_TRACE_SILK]  142.75,63.25 0 top
INT30  JUMPER-SMT_2_NC_TRACE_SILK  [SMT-JUMPER_2_NC_TRACE_SILK]  13.21,76.45 0 top
INT31  JUMPER-SMT_2_NC_TRACE_SILK  [SMT-JUMPER_2_NC_TRACE_SILK]  39.12,76.45 0 top
INT32  JUMPER-SMT_2_NC_TRACE_SILK  [SMT-JUMPER_2_NC_TRACE_SILK]  65.02,76.45 0 top
INT33  JUMPER-SMT_2_NC_TRACE_SILK  [SMT-JUMPER_2_NC_TRACE_SILK]  90.93,76.45 0 top
INT34  JUMPER-SMT_2_NC_TRACE_SILK  [SMT-JUMPER_2_NC_TRACE_SILK]  116.84,76.45 0 top
INT35  JUMPER-SMT_2_NC_TRACE_SILK  [SMT-JUMPER_2_NC_TRACE_SILK]  142.75,76.45 0 top
J1  Vertical Qwiic Connector  [JST04_1MM_VERT]  11.56,15.75 90 top
J2  Vertical Qwiic Connector  [JST04_1MM_VERT]  27.56,15.75 270 top
J3  [1X06_NO_SILK]  13.21,8.13 0 top
J4  Vertical Qwiic Connector  [JST04_1MM_VERT]  37.46,15.75 90 top
J5  Vertical Qwiic Connector  [JST04_1MM_VERT]  53.47,15.75 270 top
J6  [1X06_NO_SILK]  39.12,8.13 0 top
J7  Vertical Qwiic Connector  [JST04_1MM_VERT]  63.37,15.75 90 top
J8  Vertical Qwiic Connector  [JST04_1MM_VERT]  79.38,15.75 270 top
J9  [1X06_NO_SILK]  65.02,8.13 0 top
J10  Vertical Qwiic Connector  [JST04_1MM_VERT]  89.28,15.75 90 top
J11  Vertical Qwiic Connector  [JST04_1MM_VERT]  105.28,15.75 270 top
J12  [1X06_NO_SILK]  90.93,8.13 0 top
J13  Vertical Qwiic Connector  [JST04_1MM_VERT]  115.19,15.75 90 top
J14  Vertical Qwiic Connector  [JST04_1MM_VERT]  131.19,15.75 270 top
J15  [1X06_NO_SILK]  116.84,8.13 0 top
J16  Vertical Qwiic Connector  [JST04_1MM_VERT]  141.1,15.75 90 top
J17  Vertical Qwiic Connector  [JST04_1MM_VERT]  157.1,15.75 270 top
J18  [1X06_NO_SILK]  142.75,8.13 0 top
J19  Vertical Qwiic Connector  [JST04_1MM_VERT]  11.56,28.96 90 top
J20  Vertical Qwiic Connector  [JST04_1MM_VERT]  27.56,28.96 270 top
J21  [1X06_NO_SILK]  13.21,21.34 0 top
J22  Vertical Qwiic Connector  [JST04_1MM_VERT]  37.46,28.96 90 top
J23  Vertical Qwiic Connector  [JST04_1MM_VERT]  53.47,28.96 270 top
J24  [1X06_NO_SILK]  39.12,21.34 0 top
J25  Vertical Qwiic Connector  [JST04_1MM_VERT]  63.37,28.96 90 top
J26  Vertical Qwiic Connector  [JST04_1MM_VERT]  79.38,28.96 270 top
J27  [1X06_NO_SILK]  65.02,21.34 0 top
J28  Vertical Qwiic Connector  [JST04_1MM_VERT]  89.28,28.96 90 top
J29  Vertical Qwiic Connector  [JST04_1MM_VERT]  105.28,28.96 270 top
J30  [1X06_NO_SILK]  90.93,21.34 0 top
J31  Vertical Qwiic Connector  [JST04_1MM_VERT]  115.19,28.96 90 top
J32  Vertical Qwiic Connector  [JST04_1MM_VERT]  131.19,28.96 270 top
J33  [1X06_NO_SILK]  116.84,21.34 0 top
J34  Vertical Qwiic Connector  [JST04_1MM_VERT]  141.1,28.96 90 top
J35  Vertical Qwiic Connector  [JST04_1MM_VERT]  157.1,28.96 270 top
J36  [1X06_NO_SILK]  142.75,21.34 0 top
J37  Vertical Qwiic Connector  [JST04_1MM_VERT]  11.56,42.16 90 top
J38  Vertical Qwiic Connector  [JST04_1MM_VERT]  27.56,42.16 270 top
J39  [1X06_NO_SILK]  13.21,34.54 0 top
J40  Vertical Qwiic Connector  [JST04_1MM_VERT]  37.46,42.16 90 top
J41  Vertical Qwiic Connector  [JST04_1MM_VERT]  53.47,42.16 270 top
J42  [1X06_NO_SILK]  39.12,34.54 0 top
J43  Vertical Qwiic Connector  [JST04_1MM_VERT]  63.37,42.16 90 top
J44  Vertical Qwiic Connector  [JST04_1MM_VERT]  79.38,42.16 270 top
J45  [1X06_NO_SILK]  65.02,34.54 0 top
J46  Vertical Qwiic Connector  [JST04_1MM_VERT]  89.28,42.16 90 top
J47  Vertical Qwiic Connector  [JST04_1MM_VERT]  105.28,42.16 270 top
J48  [1X06_NO_SILK]  90.93,34.54 0 top
J49  Vertical Qwiic Connector  [JST04_1MM_VERT]  115.19,42.16 90 top
J50  Vertical Qwiic Connector  [JST04_1MM_VERT]  131.19,42.16 270 top
J51  [1X06_NO_SILK]  116.84,34.54 0 top
J52  Vertical Qwiic Connector  [JST04_1MM_VERT]  141.1,42.16 90 top
J53  Vertical Qwiic Connector  [JST04_1MM_VERT]  157.1,42.16 270 top
J54  [1X06_NO_SILK]  142.75,34.54 0 top
J55  Vertical Qwiic Connector  [JST04_1MM_VERT]  11.56,55.37 90 top
J56  Vertical Qwiic Connector  [JST04_1MM_VERT]  27.56,55.37 270 top
J57  [1X06_NO_SILK]  13.21,47.75 0 top
J58  Vertical Qwiic Connector  [JST04_1MM_VERT]  37.46,55.37 90 top
J59  Vertical Qwiic Connector  [JST04_1MM_VERT]  53.47,55.37 270 top
J60  [1X06_NO_SILK]  39.12,47.75 0 top
J61  Vertical Qwiic Connector  [JST04_1MM_VERT]  63.37,55.37 90 top
J62  Vertical Qwiic Connector  [JST04_1MM_VERT]  79.38,55.37 270 top
J63  [1X06_NO_SILK]  65.02,47.75 0 top
J64  Vertical Qwiic Connector  [JST04_1MM_VERT]  89.28,55.37 90 top
J65  Vertical Qwiic Connector  [JST04_1MM_VERT]  105.28,55.37 270 top
J66  [1X06_NO_SILK]  90.93,47.75 0 top
J67  Vertical Qwiic Connector  [JST04_1MM_VERT]  115.19,55.37 90 top
J68  Vertical Qwiic Connector  [JST04_1MM_VERT]  131.19,55.37 270 top
J69  [1X06_NO_SILK]  116.84,47.75 0 top
J70  Vertical Qwiic Connector  [JST04_1MM_VERT]  141.1,55.37 90 top
J71  Vertical Qwiic Connector  [JST04_1MM_VERT]  157.1,55.37 270 top
J72  [1X06_NO_SILK]  142.75,47.75 0 top
J73  Vertical Qwiic Connector  [JST04_1MM_VERT]  11.56,68.58 90 top
J74  Vertical Qwiic Connector  [JST04_1MM_VERT]  27.56,68.58 270 top
J75  [1X06_NO_SILK]  13.21,60.96 0 top
J76  Vertical Qwiic Connector  [JST04_1MM_VERT]  37.46,68.58 90 top
J77  Vertical Qwiic Connector  [JST04_1MM_VERT]  53.47,68.58 270 top
J78  [1X06_NO_SILK]  39.12,60.96 0 top
J79  Vertical Qwiic Connector  [JST04_1MM_VERT]  63.37,68.58 90 top
J80  Vertical Qwiic Connector  [JST04_1MM_VERT]  79.38,68.58 270 top
J81  [1X06_NO_SILK]  65.02,60.96 0 top
J82  Vertical Qwiic Connector  [JST04_1MM_VERT]  89.28,68.58 90 top
J83  Vertical Qwiic Connector  [JST04_1MM_VERT]  105.28,68.58 270 top
J84  [1X06_NO_SILK]  90.93,60.96 0 top
J85  Vertical Qwiic Connector  [JST04_1MM_VERT]  115.19,68.58 90 top
J86  Vertical Qwiic Connector  [JST04_1MM_VERT]  131.19,68.58 270 top
J87  [1X06_NO_SILK]  116.84,60.96 0 top
J88  Vertical Qwiic Connector  [JST04_1MM_VERT]  141.1,68.58 90 top
J89  Vertical Qwiic Connector  [JST04_1MM_VERT]  157.1,68.58 270 top
J90  [1X06_NO_SILK]  142.75,60.96 0 top
J91  Vertical Qwiic Connector  [JST04_1MM_VERT]  11.56,81.79 90 top
J92  Vertical Qwiic Connector  [JST04_1MM_VERT]  27.56,81.79 270 top
J93  [1X06_NO_SILK]  13.21,74.17 0 top
J94  Vertical Qwiic Connector  [JST04_1MM_VERT]  37.46,81.79 90 top
J95  Vertical Qwiic Connector  [JST04_1MM_VERT]  53.47,81.79 270 top
J96  [1X06_NO_SILK]  39.12,74.17 0 top
J97  Vertical Qwiic Connector  [JST04_1MM_VERT]  63.37,81.79 90 top
J98  Vertical Qwiic Connector  [JST04_1MM_VERT]  79.38,81.79 270 top
J99  [1X06_NO_SILK]  65.02,74.17 0 top
J100  Vertical Qwiic Connector  [JST04_1MM_VERT]  89.28,81.79 90 top
J101  Vertical Qwiic Connector  [JST04_1MM_VERT]  105.28,81.79 270 top
J102  [1X06_NO_SILK]  90.93,74.17 0 top
J103  Vertical Qwiic Connector  [JST04_1MM_VERT]  115.19,81.79 90 top
J104  Vertical Qwiic Connector  [JST04_1MM_VERT]  131.19,81.79 270 top
J105  [1X06_NO_SILK]  116.84,74.17 0 top
J106  Vertical Qwiic Connector  [JST04_1MM_VERT]  141.1,81.79 90 top
J107  Vertical Qwiic Connector  [JST04_1MM_VERT]  157.1,81.79 270 top
J108  [1X06_NO_SILK]  142.75,74.17 0 top
LED  JUMPER-SMT_2_NC_TRACE_SILK  [SMT-JUMPER_2_NC_TRACE_SILK]  22.48,13.08 0 top
LED1  JUMPER-SMT_2_NC_TRACE_SILK  [SMT-JUMPER_2_NC_TRACE_SILK]  48.39,13.08 0 top
LED2  JUMPER-SMT_2_NC_TRACE_SILK  [SMT-JUMPER_2_NC_TRACE_SILK]  74.3,13.08 0 top
LED3  JUMPER-SMT_2_NC_TRACE_SILK  [SMT-JUMPER_2_NC_TRACE_SILK]  100.2,13.08 0 top
LED4  JUMPER-SMT_2_NC_TRACE_SILK  [SMT-JUMPER_2_NC_TRACE_SILK]  126.11,13.08 0 top
LED5  JUMPER-SMT_2_NC_TRACE_SILK  [SMT-JUMPER_2_NC_TRACE_SILK]  152.02,13.08 0 top
LED6  JUMPER-SMT_2_NC_TRACE_SILK  [SMT-JUMPER_2_NC_TRACE_SILK]  22.48,26.29 0 top
LED7  JUMPER-SMT_2_NC_TRACE_SILK  [SMT-JUMPER_2_NC_TRACE_SILK]  48.39,26.29 0 top
LED8  JUMPER-SMT_2_NC_TRACE_SILK  [SMT-JUMPER_2_NC_TRACE_SILK]  74.3,26.29 0 top
LED9  JUMPER-SMT_2_NC_TRACE_SILK  [SMT-JUMPER_2_NC_TRACE_SILK]  100.2,26.29 0 top
LED10  JUMPER-SMT_2_NC_TRACE_SILK  [SMT-JUMPER_2_NC_TRACE_SILK]  126.11,26.29 0 top
LED11  JUMPER-SMT_2_NC_TRACE_SILK  [SMT-JUMPER_2_NC_TRACE_SILK]  152.02,26.29 0 top
LED12  JUMPER-SMT_2_NC_TRACE_SILK  [SMT-JUMPER_2_NC_TRACE_SILK]  22.48,39.5 0 top
LED13  JUMPER-SMT_2_NC_TRACE_SILK  [SMT-JUMPER_2_NC_TRACE_SILK]  48.39,39.5 0 top
LED14  JUMPER-SMT_2_NC_TRACE_SILK  [SMT-JUMPER_2_NC_TRACE_SILK]  74.3,39.5 0 top
LED15  JUMPER-SMT_2_NC_TRACE_SILK  [SMT-JUMPER_2_NC_TRACE_SILK]  100.2,39.5 0 top
LED16  JUMPER-SMT_2_NC_TRACE_SILK  [SMT-JUMPER_2_NC_TRACE_SILK]  126.11,39.5 0 top
LED17  JUMPER-SMT_2_NC_TRACE_SILK  [SMT-JUMPER_2_NC_TRACE_SILK]  152.02,39.5 0 top
LED18  JUMPER-SMT_2_NC_TRACE_SILK  [SMT-JUMPER_2_NC_TRACE_SILK]  22.48,52.7 0 top
LED19  JUMPER-SMT_2_NC_TRACE_SILK  [SMT-JUMPER_2_NC_TRACE_SILK]  48.39,52.7 0 top
LED20  JUMPER-SMT_2_NC_TRACE_SILK  [SMT-JUMPER_2_NC_TRACE_SILK]  74.3,52.7 0 top
LED21  JUMPER-SMT_2_NC_TRACE_SILK  [SMT-JUMPER_2_NC_TRACE_SILK]  100.2,52.7 0 top
LED22  JUMPER-SMT_2_NC_TRACE_SILK  [SMT-JUMPER_2_NC_TRACE_SILK]  126.11,52.7 0 top
LED23  JUMPER-SMT_2_NC_TRACE_SILK  [SMT-JUMPER_2_NC_TRACE_SILK]  152.02,52.7 0 top
LED24  JUMPER-SMT_2_NC_TRACE_SILK  [SMT-JUMPER_2_NC_TRACE_SILK]  22.48,65.91 0 top
LED25  JUMPER-SMT_2_NC_TRACE_SILK  [SMT-JUMPER_2_NC_TRACE_SILK]  48.39,65.91 0 top
LED26  JUMPER-SMT_2_NC_TRACE_SILK  [SMT-JUMPER_2_NC_TRACE_SILK]  74.3,65.91 0 top
LED27  JUMPER-SMT_2_NC_TRACE_SILK  [SMT-JUMPER_2_NC_TRACE_SILK]  100.2,65.91 0 top
LED28  JUMPER-SMT_2_NC_TRACE_SILK  [SMT-JUMPER_2_NC_TRACE_SILK]  126.11,65.91 0 top
LED29  JUMPER-SMT_2_NC_TRACE_SILK  [SMT-JUMPER_2_NC_TRACE_SILK]  152.02,65.91 0 top
LED30  JUMPER-SMT_2_NC_TRACE_SILK  [SMT-JUMPER_2_NC_TRACE_SILK]  22.48,79.12 0 top
LED31  JUMPER-SMT_2_NC_TRACE_SILK  [SMT-JUMPER_2_NC_TRACE_SILK]  48.39,79.12 0 top
LED32  JUMPER-SMT_2_NC_TRACE_SILK  [SMT-JUMPER_2_NC_TRACE_SILK]  74.3,79.12 0 top
LED33  JUMPER-SMT_2_NC_TRACE_SILK  [SMT-JUMPER_2_NC_TRACE_SILK]  100.2,79.12 0 top
LED34  JUMPER-SMT_2_NC_TRACE_SILK  [SMT-JUMPER_2_NC_TRACE_SILK]  126.11,79.12 0 top
LED35  JUMPER-SMT_2_NC_TRACE_SILK  [SMT-JUMPER_2_NC_TRACE_SILK]  152.02,79.12 0 top
LOGO1  OSHW-LOGOMINI  [OSHW-LOGO-MINI]  9.4,13.21 0 bottom
LOGO2  SFE_LOGO_NAME_FLAME5_MM  [SFE_LOGO_NAME_FLAME_5MM]  13.21,15.75 0 bottom
LOGO3  QWIIC_LOGO_4MM  [QWIIC_4MM]  29.72,12.06 0 bottom
LOGO4  SFE_LOGO_NAME7_MM  [SFE_LOGO_NAME_7MM]  18.41,18.54 0 top
LOGO5  OSHW-LOGOMINI  [OSHW-LOGO-MINI]  35.31,13.21 0 bottom
LOGO6  SFE_LOGO_FLAME.1_INCH  [SFE_LOGO_FLAME_.1]  17.78,15.62 0 top
LOGO7  SFE_LOGO_NAME_FLAME5_MM  [SFE_LOGO_NAME_FLAME_5MM]  39.12,15.75 0 bottom
LOGO8  QWIIC_LOGO_4MM  [QWIIC_4MM]  55.63,12.06 0 bottom
LOGO9  SFE_LOGO_NAME7_MM  [SFE_LOGO_NAME_7MM]  44.32,18.54 0 top
LOGO10  SFE_LOGO_FLAME.1_INCH  [SFE_LOGO_FLAME_.1]  43.69,15.62 0 top
LOGO11  OSHW-LOGOMINI  [OSHW-LOGO-MINI]  61.21,13.21 0 bottom
LOGO12  SFE_LOGO_NAME_FLAME5_MM  [SFE_LOGO_NAME_FLAME_5MM]  65.02,15.75 0 bottom
LOGO13  QWIIC_LOGO_4MM  [QWIIC_4MM]  81.53,12.06 0 bottom
LOGO14  SFE_LOGO_NAME7_MM  [SFE_LOGO_NAME_7MM]  70.23,18.54 0 top
LOGO15  SFE_LOGO_FLAME.1_INCH  [SFE_LOGO_FLAME_.1]  69.6,15.62 0 top
LOGO16  OSHW-LOGOMINI  [OSHW-LOGO-MINI]  87.12,13.21 0 bottom
LOGO17  SFE_LOGO_NAME_FLAME5_MM  [SFE_LOGO_NAME_FLAME_5MM]  90.93,15.75 0 bottom
LOGO18  QWIIC_LOGO_4MM  [QWIIC_4MM]  107.44,12.06 0 bottom
LOGO19  SFE_LOGO_NAME7_MM  [SFE_LOGO_NAME_7MM]  96.14,18.54 0 top
LOGO20  SFE_LOGO_FLAME.1_INCH  [SFE_LOGO_FLAME_.1]  95.5,15.62 0 top
LOGO21  OSHW-LOGOMINI  [OSHW-LOGO-MINI]  113.03,13.21 0 bottom
LOGO22  SFE_LOGO_NAME_FLAME5_MM  [SFE_LOGO_NAME_FLAME_5MM]  116.84,15.75 0 bottom
LOGO23  QWIIC_LOGO_4MM  [QWIIC_4MM]  133.35,12.06 0 bottom
LOGO24  SFE_LOGO_NAME7_MM  [SFE_LOGO_NAME_7MM]  122.05,18.54 0 top
LOGO25  SFE_LOGO_FLAME.1_INCH  [SFE_LOGO_FLAME_.1]  121.41,15.62 0 top
LOGO26  OSHW-LOGOMINI  [OSHW-LOGO-MINI]  138.94,13.21 0 bottom
LOGO27  SFE_LOGO_NAME_FLAME5_MM  [SFE_LOGO_NAME_FLAME_5MM]  142.75,15.75 0 bottom
LOGO28  QWIIC_LOGO_4MM  [QWIIC_4MM]  159.26,12.06 0 bottom
LOGO29  SFE_LOGO_NAME7_MM  [SFE_LOGO_NAME_7MM]  147.96,18.54 0 top
LOGO30  SFE_LOGO_FLAME.1_INCH  [SFE_LOGO_FLAME_.1]  147.32,15.62 0 top
LOGO31  OSHW-LOGOMINI  [OSHW-LOGO-MINI]  9.4,26.42 0 bottom
LOGO32  SFE_LOGO_NAME_FLAME5_MM  [SFE_LOGO_NAME_FLAME_5MM]  13.21,28.96 0 bottom
LOGO33  QWIIC_LOGO_4MM  [QWIIC_4MM]  29.72,25.27 0 bottom
LOGO34  SFE_LOGO_NAME7_MM  [SFE_LOGO_NAME_7MM]  18.41,31.75 0 top
LOGO35  SFE_LOGO_FLAME.1_INCH  [SFE_LOGO_FLAME_.1]  17.78,28.83 0 top
LOGO36  OSHW-LOGOMINI  [OSHW-LOGO-MINI]  35.31,26.42 0 bottom
LOGO37  SFE_LOGO_NAME_FLAME5_MM  [SFE_LOGO_NAME_FLAME_5MM]  39.12,28.96 0 bottom
LOGO38  QWIIC_LOGO_4MM  [QWIIC_4MM]  55.63,25.27 0 bottom
LOGO39  SFE_LOGO_NAME7_MM  [SFE_LOGO_NAME_7MM]  44.32,31.75 0 top
LOGO40  SFE_LOGO_FLAME.1_INCH  [SFE_LOGO_FLAME_.1]  43.69,28.83 0 top
LOGO41  OSHW-LOGOMINI  [OSHW-LOGO-MINI]  61.21,26.42 0 bottom
LOGO42  SFE_LOGO_NAME_FLAME5_MM  [SFE_LOGO_NAME_FLAME_5MM]  65.02,28.96 0 bottom
LOGO43  QWIIC_LOGO_4MM  [QWIIC_4MM]  81.53,25.27 0 bottom
LOGO44  SFE_LOGO_NAME7_MM  [SFE_LOGO_NAME_7MM]  70.23,31.75 0 top
LOGO45  SFE_LOGO_FLAME.1_INCH  [SFE_LOGO_FLAME_.1]  69.6,28.83 0 top
LOGO46  OSHW-LOGOMINI  [OSHW-LOGO-MINI]  87.12,26.42 0 bottom
LOGO47  SFE_LOGO_NAME_FLAME5_MM  [SFE_LOGO_NAME_FLAME_5MM]  90.93,28.96 0 bottom
LOGO48  QWIIC_LOGO_4MM  [QWIIC_4MM]  107.44,25.27 0 bottom
LOGO49  SFE_LOGO_NAME7_MM  [SFE_LOGO_NAME_7MM]  96.14,31.75 0 top
LOGO50  SFE_LOGO_FLAME.1_INCH  [SFE_LOGO_FLAME_.1]  95.5,28.83 0 top
LOGO51  OSHW-LOGOMINI  [OSHW-LOGO-MINI]  113.03,26.42 0 bottom
LOGO52  SFE_LOGO_NAME_FLAME5_MM  [SFE_LOGO_NAME_FLAME_5MM]  116.84,28.96 0 bottom
LOGO53  QWIIC_LOGO_4MM  [QWIIC_4MM]  133.35,25.27 0 bottom
LOGO54  SFE_LOGO_NAME7_MM  [SFE_LOGO_NAME_7MM]  122.05,31.75 0 top
LOGO55  SFE_LOGO_FLAME.1_INCH  [SFE_LOGO_FLAME_.1]  121.41,28.83 0 top
LOGO56  OSHW-LOGOMINI  [OSHW-LOGO-MINI]  138.94,26.42 0 bottom
LOGO57  SFE_LOGO_NAME_FLAME5_MM  [SFE_LOGO_NAME_FLAME_5MM]  142.75,28.96 0 bottom
LOGO58  QWIIC_LOGO_4MM  [QWIIC_4MM]  159.26,25.27 0 bottom
LOGO59  SFE_LOGO_NAME7_MM  [SFE_LOGO_NAME_7MM]  147.96,31.75 0 top
LOGO60  SFE_LOGO_FLAME.1_INCH  [SFE_LOGO_FLAME_.1]  147.32,28.83 0 top
LOGO61  OSHW-LOGOMINI  [OSHW-LOGO-MINI]  9.4,39.62 0 bottom
LOGO62  SFE_LOGO_NAME_FLAME5_MM  [SFE_LOGO_NAME_FLAME_5MM]  13.21,42.16 0 bottom
LOGO63  QWIIC_LOGO_4MM  [QWIIC_4MM]  29.72,38.48 0 bottom
LOGO64  SFE_LOGO_NAME7_MM  [SFE_LOGO_NAME_7MM]  18.41,44.96 0 top
LOGO65  SFE_LOGO_FLAME.1_INCH  [SFE_LOGO_FLAME_.1]  17.78,42.04 0 top
LOGO66  OSHW-LOGOMINI  [OSHW-LOGO-MINI]  35.31,39.62 0 bottom
LOGO67  SFE_LOGO_NAME_FLAME5_MM  [SFE_LOGO_NAME_FLAME_5MM]  39.12,42.16 0 bottom
LOGO68  QWIIC_LOGO_4MM  [QWIIC_4MM]  55.63,38.48 0 bottom
LOGO69  SFE_LOGO_NAME7_MM  [SFE_LOGO_NAME_7MM]  44.32,44.96 0 top
LOGO70  SFE_LOGO_FLAME.1_INCH  [SFE_LOGO_FLAME_.1]  43.69,42.04 0 top
LOGO71  OSHW-LOGOMINI  [OSHW-LOGO-MINI]  61.21,39.62 0 bottom
LOGO72  SFE_LOGO_NAME_FLAME5_MM  [SFE_LOGO_NAME_FLAME_5MM]  65.02,42.16 0 bottom
LOGO73  QWIIC_LOGO_4MM  [QWIIC_4MM]  81.53,38.48 0 bottom
LOGO74  SFE_LOGO_NAME7_MM  [SFE_LOGO_NAME_7MM]  70.23,44.96 0 top
LOGO75  SFE_LOGO_FLAME.1_INCH  [SFE_LOGO_FLAME_.1]  69.6,42.04 0 top
LOGO76  OSHW-LOGOMINI  [OSHW-LOGO-MINI]  87.12,39.62 0 bottom
LOGO77  SFE_LOGO_NAME_FLAME5_MM  [SFE_LOGO_NAME_FLAME_5MM]  90.93,42.16 0 bottom
LOGO78  QWIIC_LOGO_4MM  [QWIIC_4MM]  107.44,38.48 0 bottom
LOGO79  SFE_LOGO_NAME7_MM  [SFE_LOGO_NAME_7MM]  96.14,44.96 0 top
LOGO80  SFE_LOGO_FLAME.1_INCH  [SFE_LOGO_FLAME_.1]  95.5,42.04 0 top
LOGO81  OSHW-LOGOMINI  [OSHW-LOGO-MINI]  113.03,39.62 0 bottom
LOGO82  SFE_LOGO_NAME_FLAME5_MM  [SFE_LOGO_NAME_FLAME_5MM]  116.84,42.16 0 bottom
LOGO83  QWIIC_LOGO_4MM  [QWIIC_4MM]  133.35,38.48 0 bottom
LOGO84  SFE_LOGO_NAME7_MM  [SFE_LOGO_NAME_7MM]  122.05,44.96 0 top
LOGO85  SFE_LOGO_FLAME.1_INCH  [SFE_LOGO_FLAME_.1]  121.41,42.04 0 top
LOGO86  OSHW-LOGOMINI  [OSHW-LOGO-MINI]  138.94,39.62 0 bottom
LOGO87  SFE_LOGO_NAME_FLAME5_MM  [SFE_LOGO_NAME_FLAME_5MM]  142.75,42.16 0 bottom
LOGO88  QWIIC_LOGO_4MM  [QWIIC_4MM]  159.26,38.48 0 bottom
LOGO89  SFE_LOGO_NAME7_MM  [SFE_LOGO_NAME_7MM]  147.96,44.96 0 top
LOGO90  SFE_LOGO_FLAME.1_INCH  [SFE_LOGO_FLAME_.1]  147.32,42.04 0 top
LOGO91  OSHW-LOGOMINI  [OSHW-LOGO-MINI]  9.4,52.83 0 bottom
LOGO92  SFE_LOGO_NAME_FLAME5_MM  [SFE_LOGO_NAME_FLAME_5MM]  13.21,55.37 0 bottom
LOGO93  QWIIC_LOGO_4MM  [QWIIC_4MM]  29.72,51.69 0 bottom
LOGO94  SFE_LOGO_NAME7_MM  [SFE_LOGO_NAME_7MM]  18.41,58.17 0 top
LOGO95  SFE_LOGO_FLAME.1_INCH  [SFE_LOGO_FLAME_.1]  17.78,55.24 0 top
LOGO96  OSHW-LOGOMINI  [OSHW-LOGO-MINI]  35.31,52.83 0 bottom
LOGO97  SFE_LOGO_NAME_FLAME5_MM  [SFE_LOGO_NAME_FLAME_5MM]  39.12,55.37 0 bottom
LOGO98  QWIIC_LOGO_4MM  [QWIIC_4MM]  55.63,51.69 0 bottom
LOGO99  SFE_LOGO_NAME7_MM  [SFE_LOGO_NAME_7MM]  44.32,58.17 0 top
LOGO100  SFE_LOGO_FLAME.1_INCH  [SFE_LOGO_FLAME_.1]  43.69,55.24 0 top
LOGO101  OSHW-LOGOMINI  [OSHW-LOGO-MINI]  61.21,52.83 0 bottom
LOGO102  SFE_LOGO_NAME_FLAME5_MM  [SFE_LOGO_NAME_FLAME_5MM]  65.02,55.37 0 bottom
LOGO103  QWIIC_LOGO_4MM  [QWIIC_4MM]  81.53,51.69 0 bottom
LOGO104  SFE_LOGO_NAME7_MM  [SFE_LOGO_NAME_7MM]  70.23,58.17 0 top
LOGO105  SFE_LOGO_FLAME.1_INCH  [SFE_LOGO_FLAME_.1]  69.6,55.24 0 top
LOGO106  OSHW-LOGOMINI  [OSHW-LOGO-MINI]  87.12,52.83 0 bottom
LOGO107  SFE_LOGO_NAME_FLAME5_MM  [SFE_LOGO_NAME_FLAME_5MM]  90.93,55.37 0 bottom
LOGO108  QWIIC_LOGO_4MM  [QWIIC_4MM]  107.44,51.69 0 bottom
LOGO109  SFE_LOGO_NAME7_MM  [SFE_LOGO_NAME_7MM]  96.14,58.17 0 top
LOGO110  SFE_LOGO_FLAME.1_INCH  [SFE_LOGO_FLAME_.1]  95.5,55.24 0 top
LOGO111  OSHW-LOGOMINI  [OSHW-LOGO-MINI]  113.03,52.83 0 bottom
LOGO112  SFE_LOGO_NAME_FLAME5_MM  [SFE_LOGO_NAME_FLAME_5MM]  116.84,55.37 0 bottom
LOGO113  QWIIC_LOGO_4MM  [QWIIC_4MM]  133.35,51.69 0 bottom
LOGO114  SFE_LOGO_NAME7_MM  [SFE_LOGO_NAME_7MM]  122.05,58.17 0 top
LOGO115  SFE_LOGO_FLAME.1_INCH  [SFE_LOGO_FLAME_.1]  121.41,55.24 0 top
LOGO116  OSHW-LOGOMINI  [OSHW-LOGO-MINI]  138.94,52.83 0 bottom
LOGO117  SFE_LOGO_NAME_FLAME5_MM  [SFE_LOGO_NAME_FLAME_5MM]  142.75,55.37 0 bottom
LOGO118  QWIIC_LOGO_4MM  [QWIIC_4MM]  159.26,51.69 0 bottom
LOGO119  SFE_LOGO_NAME7_MM  [SFE_LOGO_NAME_7MM]  147.96,58.17 0 top
LOGO120  SFE_LOGO_FLAME.1_INCH  [SFE_LOGO_FLAME_.1]  147.32,55.24 0 top
LOGO121  OSHW-LOGOMINI  [OSHW-LOGO-MINI]  9.4,66.04 0 bottom
LOGO122  SFE_LOGO_NAME_FLAME5_MM  [SFE_LOGO_NAME_FLAME_5MM]  13.21,68.58 0 bottom
LOGO123  QWIIC_LOGO_4MM  [QWIIC_4MM]  29.72,64.9 0 bottom
LOGO124  SFE_LOGO_NAME7_MM  [SFE_LOGO_NAME_7MM]  18.41,71.37 0 top
LOGO125  SFE_LOGO_FLAME.1_INCH  [SFE_LOGO_FLAME_.1]  17.78,68.45 0 top
LOGO126  OSHW-LOGOMINI  [OSHW-LOGO-MINI]  35.31,66.04 0 bottom
LOGO127  SFE_LOGO_NAME_FLAME5_MM  [SFE_LOGO_NAME_FLAME_5MM]  39.12,68.58 0 bottom
LOGO128  QWIIC_LOGO_4MM  [QWIIC_4MM]  55.63,64.9 0 bottom
LOGO129  SFE_LOGO_NAME7_MM  [SFE_LOGO_NAME_7MM]  44.32,71.37 0 top
LOGO130  SFE_LOGO_FLAME.1_INCH  [SFE_LOGO_FLAME_.1]  43.69,68.45 0 top
LOGO131  OSHW-LOGOMINI  [OSHW-LOGO-MINI]  61.21,66.04 0 bottom
LOGO132  SFE_LOGO_NAME_FLAME5_MM  [SFE_LOGO_NAME_FLAME_5MM]  65.02,68.58 0 bottom
LOGO133  QWIIC_LOGO_4MM  [QWIIC_4MM]  81.53,64.9 0 bottom
LOGO134  SFE_LOGO_NAME7_MM  [SFE_LOGO_NAME_7MM]  70.23,71.37 0 top
LOGO135  SFE_LOGO_FLAME.1_INCH  [SFE_LOGO_FLAME_.1]  69.6,68.45 0 top
LOGO136  OSHW-LOGOMINI  [OSHW-LOGO-MINI]  87.12,66.04 0 bottom
LOGO137  SFE_LOGO_NAME_FLAME5_MM  [SFE_LOGO_NAME_FLAME_5MM]  90.93,68.58 0 bottom
LOGO138  QWIIC_LOGO_4MM  [QWIIC_4MM]  107.44,64.9 0 bottom
LOGO139  SFE_LOGO_NAME7_MM  [SFE_LOGO_NAME_7MM]  96.14,71.37 0 top
LOGO140  SFE_LOGO_FLAME.1_INCH  [SFE_LOGO_FLAME_.1]  95.5,68.45 0 top
LOGO141  OSHW-LOGOMINI  [OSHW-LOGO-MINI]  113.03,66.04 0 bottom
LOGO142  SFE_LOGO_NAME_FLAME5_MM  [SFE_LOGO_NAME_FLAME_5MM]  116.84,68.58 0 bottom
LOGO143  QWIIC_LOGO_4MM  [QWIIC_4MM]  133.35,64.9 0 bottom
LOGO144  SFE_LOGO_NAME7_MM  [SFE_LOGO_NAME_7MM]  122.05,71.37 0 top
LOGO145  SFE_LOGO_FLAME.1_INCH  [SFE_LOGO_FLAME_.1]  121.41,68.45 0 top
LOGO146  OSHW-LOGOMINI  [OSHW-LOGO-MINI]  138.94,66.04 0 bottom
LOGO147  SFE_LOGO_NAME_FLAME5_MM  [SFE_LOGO_NAME_FLAME_5MM]  142.75,68.58 0 bottom
LOGO148  QWIIC_LOGO_4MM  [QWIIC_4MM]  159.26,64.9 0 bottom
LOGO149  SFE_LOGO_NAME7_MM  [SFE_LOGO_NAME_7MM]  147.96,71.37 0 top
LOGO150  SFE_LOGO_FLAME.1_INCH  [SFE_LOGO_FLAME_.1]  147.32,68.45 0 top
LOGO151  OSHW-LOGOMINI  [OSHW-LOGO-MINI]  9.4,79.25 0 bottom
LOGO152  SFE_LOGO_NAME_FLAME5_MM  [SFE_LOGO_NAME_FLAME_5MM]  13.21,81.79 0 bottom
LOGO153  QWIIC_LOGO_4MM  [QWIIC_4MM]  29.72,78.11 0 bottom
LOGO154  SFE_LOGO_NAME7_MM  [SFE_LOGO_NAME_7MM]  18.41,84.58 0 top
LOGO155  SFE_LOGO_FLAME.1_INCH  [SFE_LOGO_FLAME_.1]  17.78,81.66 0 top
LOGO156  OSHW-LOGOMINI  [OSHW-LOGO-MINI]  35.31,79.25 0 bottom
LOGO157  SFE_LOGO_NAME_FLAME5_MM  [SFE_LOGO_NAME_FLAME_5MM]  39.12,81.79 0 bottom
LOGO158  QWIIC_LOGO_4MM  [QWIIC_4MM]  55.63,78.11 0 bottom
LOGO159  SFE_LOGO_NAME7_MM  [SFE_LOGO_NAME_7MM]  44.32,84.58 0 top
LOGO160  SFE_LOGO_FLAME.1_INCH  [SFE_LOGO_FLAME_.1]  43.69,81.66 0 top
LOGO161  OSHW-LOGOMINI  [OSHW-LOGO-MINI]  61.21,79.25 0 bottom
LOGO162  SFE_LOGO_NAME_FLAME5_MM  [SFE_LOGO_NAME_FLAME_5MM]  65.02,81.79 0 bottom
LOGO163  QWIIC_LOGO_4MM  [QWIIC_4MM]  81.53,78.11 0 bottom
LOGO164  SFE_LOGO_NAME7_MM  [SFE_LOGO_NAME_7MM]  70.23,84.58 0 top
LOGO165  SFE_LOGO_FLAME.1_INCH  [SFE_LOGO_FLAME_.1]  69.6,81.66 0 top
LOGO166  OSHW-LOGOMINI  [OSHW-LOGO-MINI]  87.12,79.25 0 bottom
LOGO167  SFE_LOGO_NAME_FLAME5_MM  [SFE_LOGO_NAME_FLAME_5MM]  90.93,81.79 0 bottom
LOGO168  QWIIC_LOGO_4MM  [QWIIC_4MM]  107.44,78.11 0 bottom
LOGO169  SFE_LOGO_NAME7_MM  [SFE_LOGO_NAME_7MM]  96.14,84.58 0 top
LOGO170  SFE_LOGO_FLAME.1_INCH  [SFE_LOGO_FLAME_.1]  95.5,81.66 0 top
LOGO171  OSHW-LOGOMINI  [OSHW-LOGO-MINI]  113.03,79.25 0 bottom
LOGO172  SFE_LOGO_NAME_FLAME5_MM  [SFE_LOGO_NAME_FLAME_5MM]  116.84,81.79 0 bottom
LOGO173  QWIIC_LOGO_4MM  [QWIIC_4MM]  133.35,78.11 0 bottom
LOGO174  SFE_LOGO_NAME7_MM  [SFE_LOGO_NAME_7MM]  122.05,84.58 0 top
LOGO175  SFE_LOGO_FLAME.1_INCH  [SFE_LOGO_FLAME_.1]  121.41,81.66 0 top
LOGO176  OSHW-LOGOMINI  [OSHW-LOGO-MINI]  138.94,79.25 0 bottom
LOGO177  SFE_LOGO_NAME_FLAME5_MM  [SFE_LOGO_NAME_FLAME_5MM]  142.75,81.79 0 bottom
LOGO178  QWIIC_LOGO_4MM  [QWIIC_4MM]  159.26,78.11 0 bottom
LOGO179  SFE_LOGO_NAME7_MM  [SFE_LOGO_NAME_7MM]  147.96,84.58 0 top
LOGO180  SFE_LOGO_FLAME.1_INCH  [SFE_LOGO_FLAME_.1]  147.32,81.66 0 top
Q1  20V/4.2A/52mΩ/1.4W  [SOT23-3]  14.48,14.48 270 top
Q2  20V/4.2A/52mΩ/1.4W  [SOT23-3]  40.39,14.48 270 top
Q3  20V/4.2A/52mΩ/1.4W  [SOT23-3]  66.29,14.48 270 top
Q4  20V/4.2A/52mΩ/1.4W  [SOT23-3]  92.2,14.48 270 top
Q5  20V/4.2A/52mΩ/1.4W  [SOT23-3]  118.11,14.48 270 top
Q6  20V/4.2A/52mΩ/1.4W  [SOT23-3]  144.02,14.48 270 top
Q7  20V/4.2A/52mΩ/1.4W  [SOT23-3]  14.48,27.69 270 top
Q8  20V/4.2A/52mΩ/1.4W  [SOT23-3]  40.39,27.69 270 top
Q9  20V/4.2A/52mΩ/1.4W  [SOT23-3]  66.29,27.69 270 top
Q10  20V/4.2A/52mΩ/1.4W  [SOT23-3]  92.2,27.69 270 top
Q11  20V/4.2A/52mΩ/1.4W  [SOT23-3]  118.11,27.69 270 top
Q12  20V/4.2A/52mΩ/1.4W  [SOT23-3]  144.02,27.69 270 top
Q13  20V/4.2A/52mΩ/1.4W  [SOT23-3]  14.48,40.89 270 top
Q14  20V/4.2A/52mΩ/1.4W  [SOT23-3]  40.39,40.89 270 top
Q15  20V/4.2A/52mΩ/1.4W  [SOT23-3]  66.29,40.89 270 top
Q16  20V/4.2A/52mΩ/1.4W  [SOT23-3]  92.2,40.89 270 top
Q17  20V/4.2A/52mΩ/1.4W  [SOT23-3]  118.11,40.89 270 top
Q18  20V/4.2A/52mΩ/1.4W  [SOT23-3]  144.02,40.89 270 top
Q19  20V/4.2A/52mΩ/1.4W  [SOT23-3]  14.48,54.1 270 top
Q20  20V/4.2A/52mΩ/1.4W  [SOT23-3]  40.39,54.1 270 top
Q21  20V/4.2A/52mΩ/1.4W  [SOT23-3]  66.29,54.1 270 top
Q22  20V/4.2A/52mΩ/1.4W  [SOT23-3]  92.2,54.1 270 top
Q23  20V/4.2A/52mΩ/1.4W  [SOT23-3]  118.11,54.1 270 top
Q24  20V/4.2A/52mΩ/1.4W  [SOT23-3]  144.02,54.1 270 top
Q25  20V/4.2A/52mΩ/1.4W  [SOT23-3]  14.48,67.31 270 top
Q26  20V/4.2A/52mΩ/1.4W  [SOT23-3]  40.39,67.31 270 top
Q27  20V/4.2A/52mΩ/1.4W  [SOT23-3]  66.29,67.31 270 top
Q28  20V/4.2A/52mΩ/1.4W  [SOT23-3]  92.2,67.31 270 top
Q29  20V/4.2A/52mΩ/1.4W  [SOT23-3]  118.11,67.31 270 top
Q30  20V/4.2A/52mΩ/1.4W  [SOT23-3]  144.02,67.31 270 top
Q31  20V/4.2A/52mΩ/1.4W  [SOT23-3]  14.48,80.52 270 top
Q32  20V/4.2A/52mΩ/1.4W  [SOT23-3]  40.39,80.52 270 top
Q33  20V/4.2A/52mΩ/1.4W  [SOT23-3]  66.29,80.52 270 top
Q34  20V/4.2A/52mΩ/1.4W  [SOT23-3]  92.2,80.52 270 top
Q35  20V/4.2A/52mΩ/1.4W  [SOT23-3]  118.11,80.52 270 top
Q36  20V/4.2A/52mΩ/1.4W  [SOT23-3]  144.02,80.52 270 top
R1  2.2k  [0603]  46.74,17.14 0 top
R2  2.2k  [0603]  20.83,17.14 0 top
R3  4.7k  [0603]  25.65,15.75 270 top
R4  10k  [0603]  17.91,11.43 0 top
R5  2.2k  [0603]  20.83,15.24 180 top
R6  10k  [0603]  43.81,11.43 0 top
R7  10k  [0603]  14.1,17.02 0 top
R8  2.2k  [0603]  46.74,15.24 180 top
R9  4.7k  [0603]  51.56,15.75 270 top
R10  10k  [0603]  40,17.02 0 top
R11  2.2k  [0603]  72.64,17.14 0 top
R12  10k  [0603]  69.72,11.43 0 top
R13  2.2k  [0603]  72.64,15.24 180 top
R14  4.7k  [0603]  77.47,15.75 270 top
R15  10k  [0603]  65.91,17.02 0 top
R16  2.2k  [0603]  98.55,17.14 0 top
R17  10k  [0603]  95.63,11.43 0 top
R18  2.2k  [0603]  98.55,15.24 180 top
R19  4.7k  [0603]  103.38,15.75 270 top
R20  10k  [0603]  91.82,17.02 0 top
R21  2.2k  [0603]  124.46,17.14 0 top
R22  10k  [0603]  121.54,11.43 0 top
R23  2.2k  [0603]  124.46,15.24 180 top
R24  4.7k  [0603]  129.29,15.75 270 top
R25  10k  [0603]  117.73,17.02 0 top
R26  2.2k  [0603]  150.37,17.14 0 top
R27  10k  [0603]  147.45,11.43 0 top
R28  2.2k  [0603]  150.37,15.24 180 top
R29  4.7k  [0603]  155.19,15.75 270 top
R30  10k  [0603]  143.64,17.02 0 top
R31  2.2k  [0603]  20.83,30.35 0 top
R32  10k  [0603]  17.91,24.64 0 top
R33  2.2k  [0603]  20.83,28.45 180 top
R34  4.7k  [0603]  25.65,28.96 270 top
R35  10k  [0603]  14.1,30.23 0 top
R36  2.2k  [0603]  46.74,30.35 0 top
R37  10k  [0603]  43.81,24.64 0 top
R38  2.2k  [0603]  46.74,28.45 180 top
R39  4.7k  [0603]  51.56,28.96 270 top
R40  10k  [0603]  40,30.23 0 top
R41  2.2k  [0603]  72.64,30.35 0 top
R42  10k  [0603]  69.72,24.64 0 top
R43  2.2k  [0603]  72.64,28.45 180 top
R44  4.7k  [0603]  77.47,28.96 270 top
R45  10k  [0603]  65.91,30.23 0 top
R46  2.2k  [0603]  98.55,30.35 0 top
R47  10k  [0603]  95.63,24.64 0 top
R48  2.2k  [0603]  98.55,28.45 180 top
R49  4.7k  [0603]  103.38,28.96 270 top
R50  10k  [0603]  91.82,30.23 0 top
R51  2.2k  [0603]  124.46,30.35 0 top
R52  10k  [0603]  121.54,24.64 0 top
R53  2.2k  [0603]  124.46,28.45 180 top
R54  4.7k  [0603]  129.29,28.96 270 top
R55  10k  [0603]  117.73,30.23 0 top
R56  2.2k  [0603]  150.37,30.35 0 top
R57  10k  [0603]  147.45,24.64 0 top
R58  2.2k  [0603]  150.37,28.45 180 top
R59  4.7k  [0603]  155.19,28.96 270 top
R60  10k  [0603]  143.64,30.23 0 top
R61  2.2k  [0603]  20.83,43.56 0 top
R62  10k  [0603]  17.91,37.85 0 top
R63  2.2k  [0603]  20.83,41.66 180 top
R64  4.7k  [0603]  25.65,42.16 270 top
R65  10k  [0603]  14.1,43.43 0 top
R66  2.2k  [0603]  46.74,43.56 0 top
R67  10k  [0603]  43.81,37.85 0 top
R68  2.2k  [0603]  46.74,41.66 180 top
R69  4.7k  [0603]  51.56,42.16 270 top
R70  10k  [0603]  40,43.43 0 top
R71  2.2k  [0603]  72.64,43.56 0 top
R72  10k  [0603]  69.72,37.85 0 top
R73  2.2k  [0603]  72.64,41.66 180 top
R74  4.7k  [0603]  77.47,42.16 270 top
R75  10k  [0603]  65.91,43.43 0 top
R76  2.2k  [0603]  98.55,43.56 0 top
R77  10k  [0603]  95.63,37.85 0 top
R78  2.2k  [0603]  98.55,41.66 180 top
R79  4.7k  [0603]  103.38,42.16 270 top
R80  10k  [0603]  91.82,43.43 0 top
R81  2.2k  [0603]  124.46,43.56 0 top
R82  10k  [0603]  121.54,37.85 0 top
R83  2.2k  [0603]  124.46,41.66 180 top
R84  4.7k  [0603]  129.29,42.16 270 top
R85  10k  [0603]  117.73,43.43 0 top
R86  2.2k  [0603]  150.37,43.56 0 top
R87  10k  [0603]  147.45,37.85 0 top
R88  2.2k  [0603]  150.37,41.66 180 top
R89  4.7k  [0603]  155.19,42.16 270 top
R90  10k  [0603]  143.64,43.43 0 top
R91  2.2k  [0603]  20.83,56.77 0 top
R92  10k  [0603]  17.91,51.05 0 top
R93  2.2k  [0603]  20.83,54.86 180 top
R94  4.7k  [0603]  25.65,55.37 270 top
R95  10k  [0603]  14.1,56.64 0 top
R96  2.2k  [0603]  46.74,56.77 0 top
R97  10k  [0603]  43.81,51.05 0 top
R98  2.2k  [0603]  46.74,54.86 180 top
R99  4.7k  [0603]  51.56,55.37 270 top
R100  10k  [0603]  40,56.64 0 top
R101  2.2k  [0603]  72.64,56.77 0 top
R102  10k  [0603]  69.72,51.05 0 top
R103  2.2k  [0603]  72.64,54.86 180 top
R104  4.7k  [0603]  77.47,55.37 270 top
R105  10k  [0603]  65.91,56.64 0 top
R106  2.2k  [0603]  98.55,56.77 0 top
R107  10k  [0603]  95.63,51.05 0 top
R108  2.2k  [0603]  98.55,54.86 180 top
R109  4.7k  [0603]  103.38,55.37 270 top